# Altium PCB SD171-6.0PCB4.PcbDoc (part 1 of 11)
Units mil, origin at the board's own origin, x right, y up, seen from the top; angles counter-clockwise.
Board outline 5995 x 3921.26 mil, 6 copper layers (Top Layer, GND, Mid-Layer 1, Mid-Layer 2, VCC, Bottom Layer); 477 components, 539 nets, 2143 pads, 1050 vias.
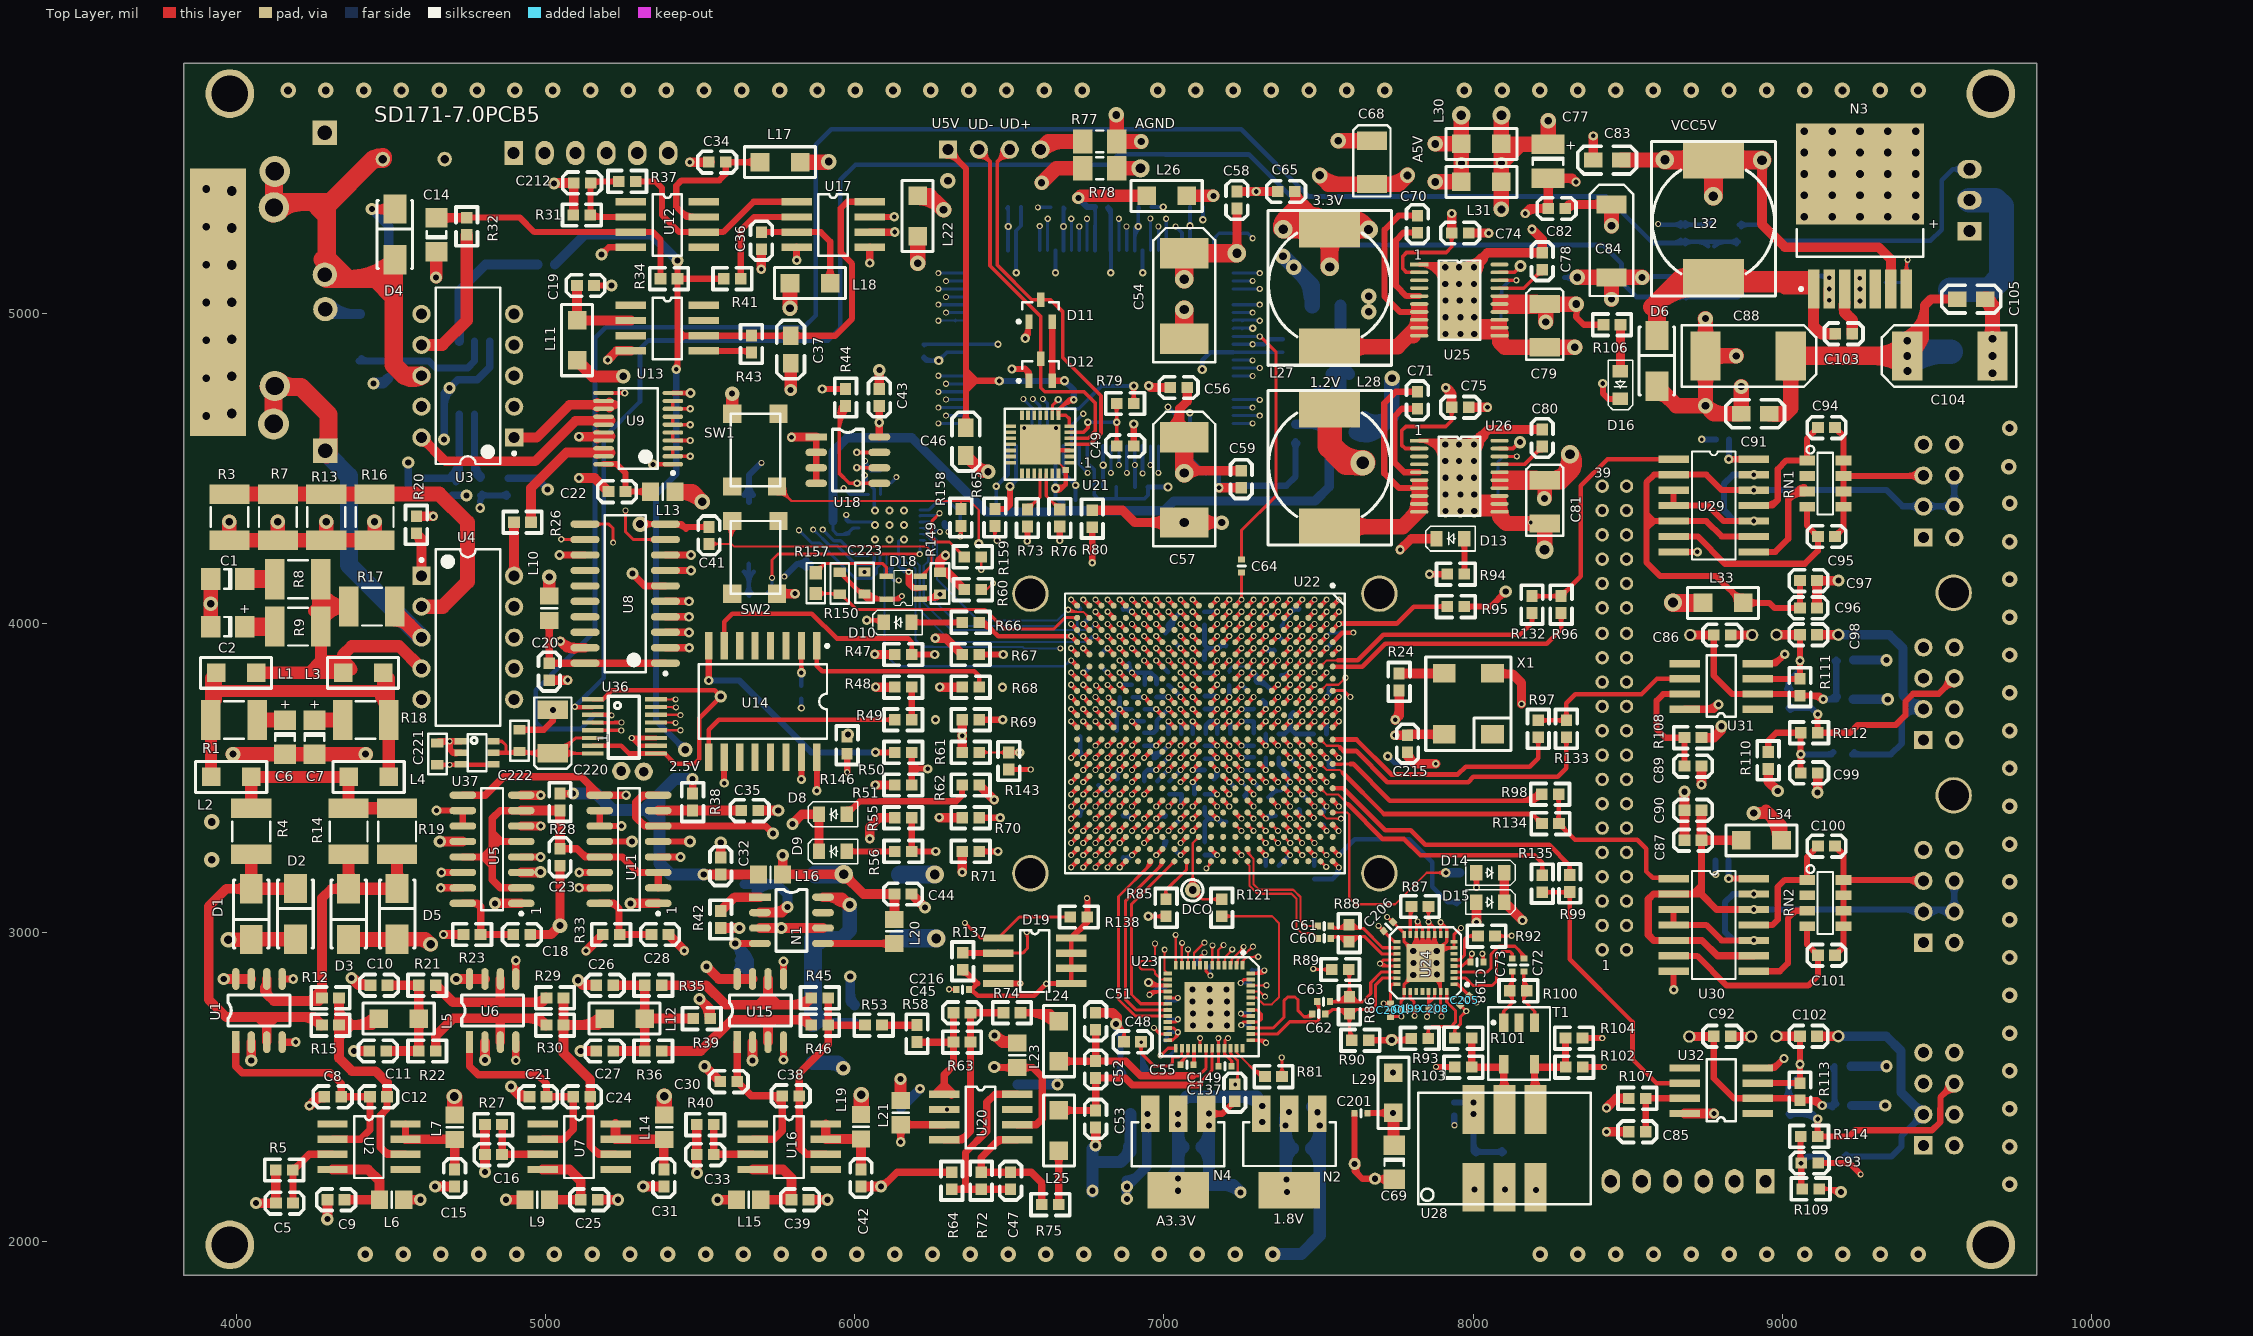
[diagram p0: Top Layer view]
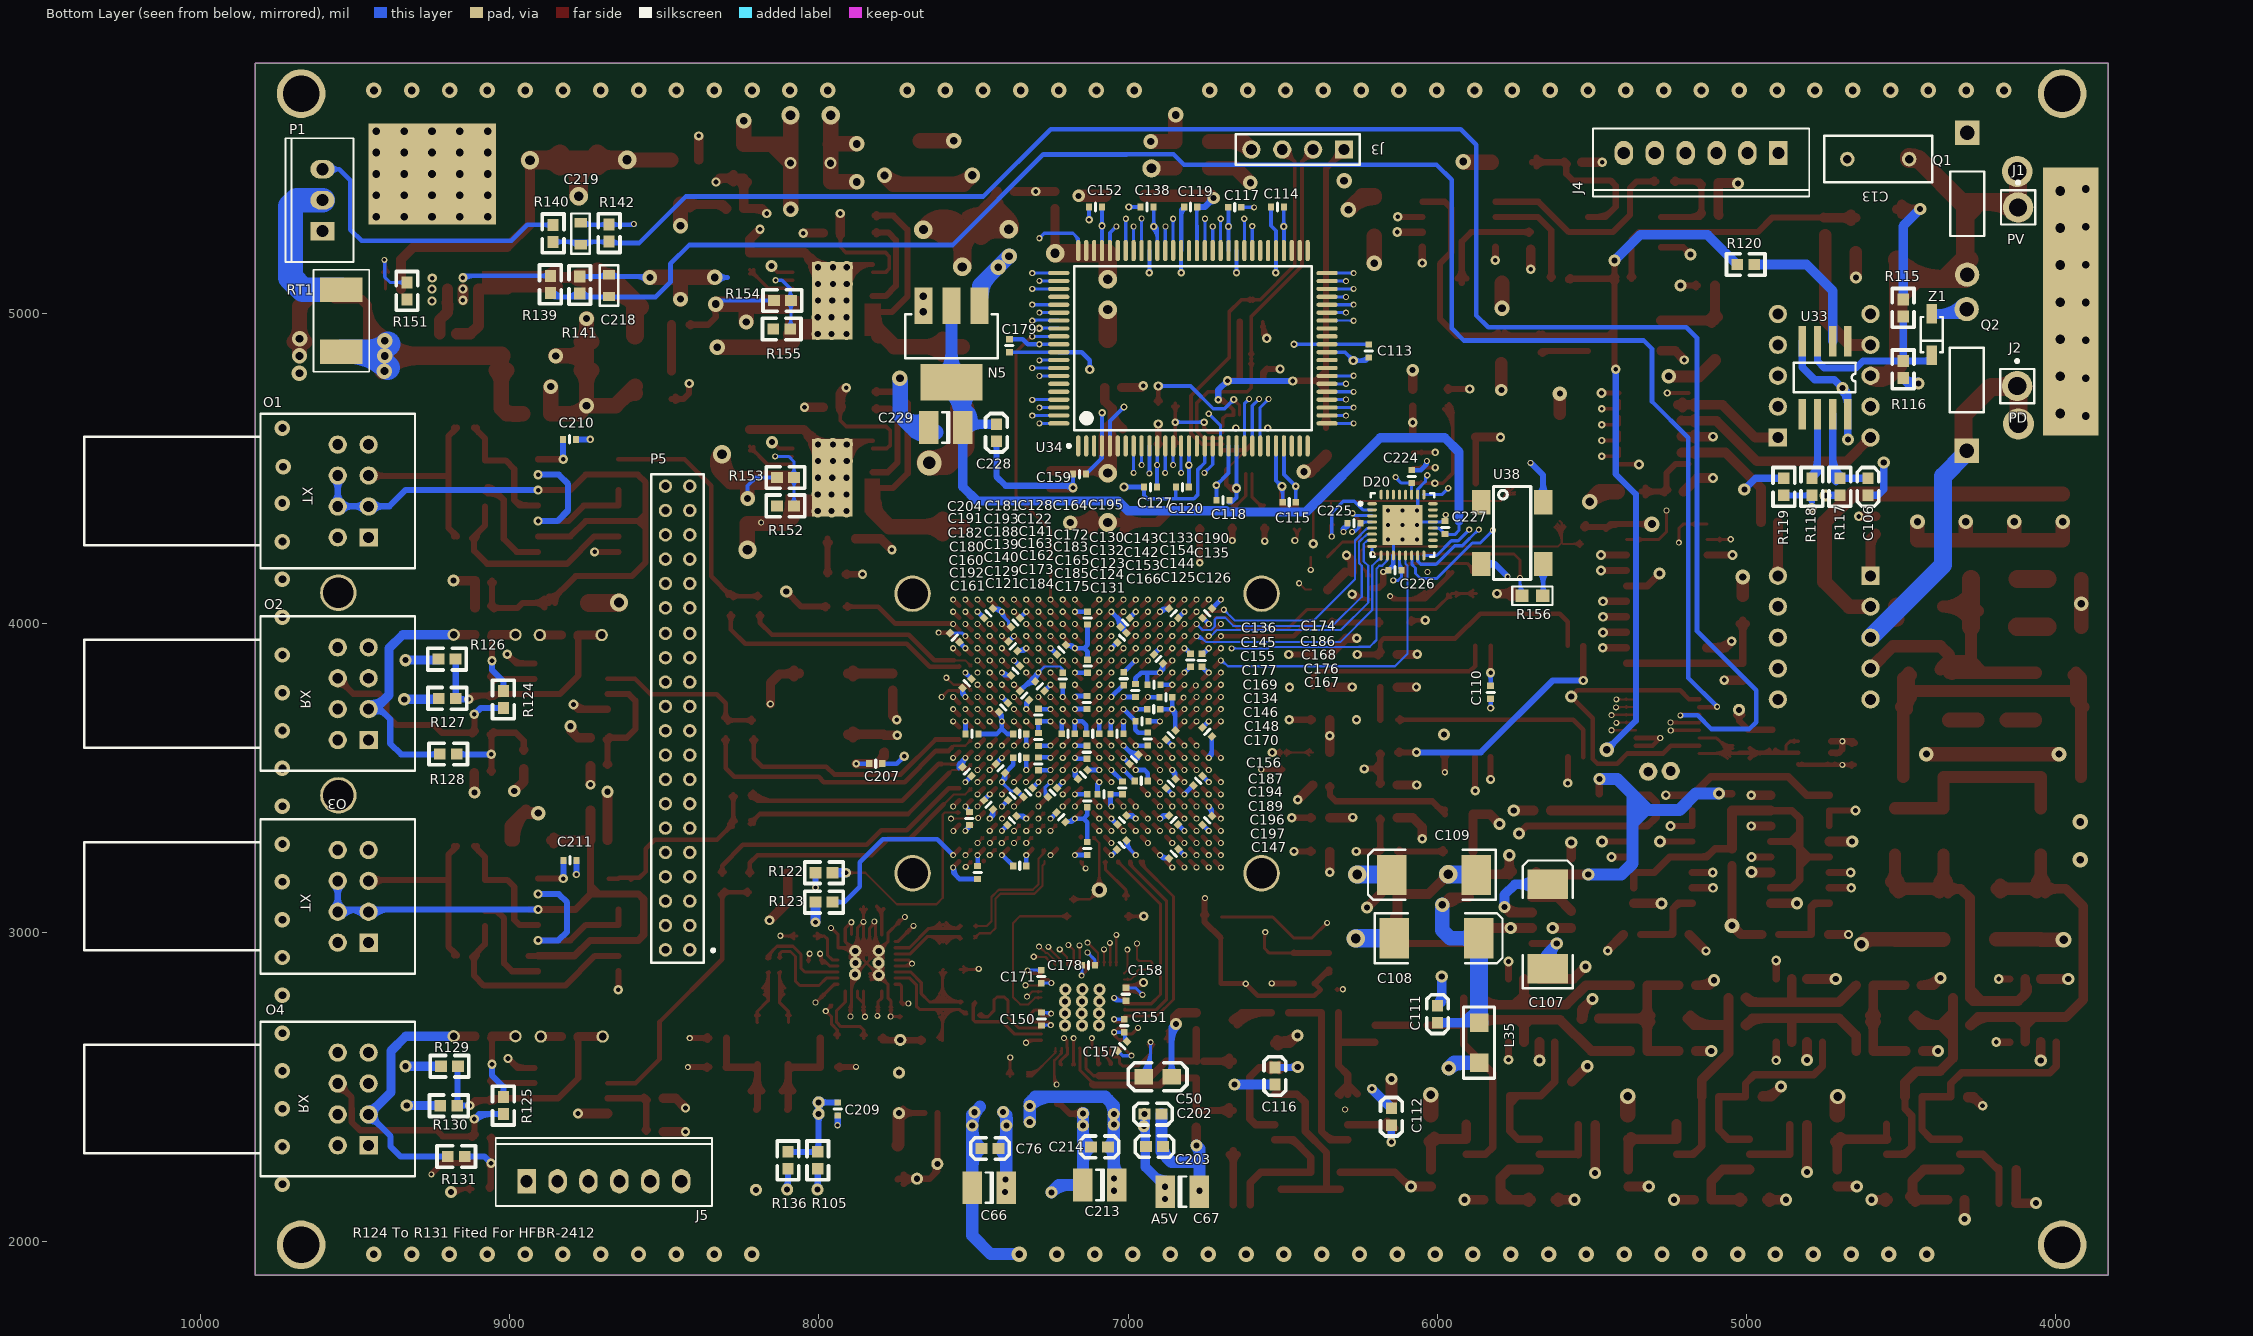
[diagram p1: Bottom Layer view, seen from below]
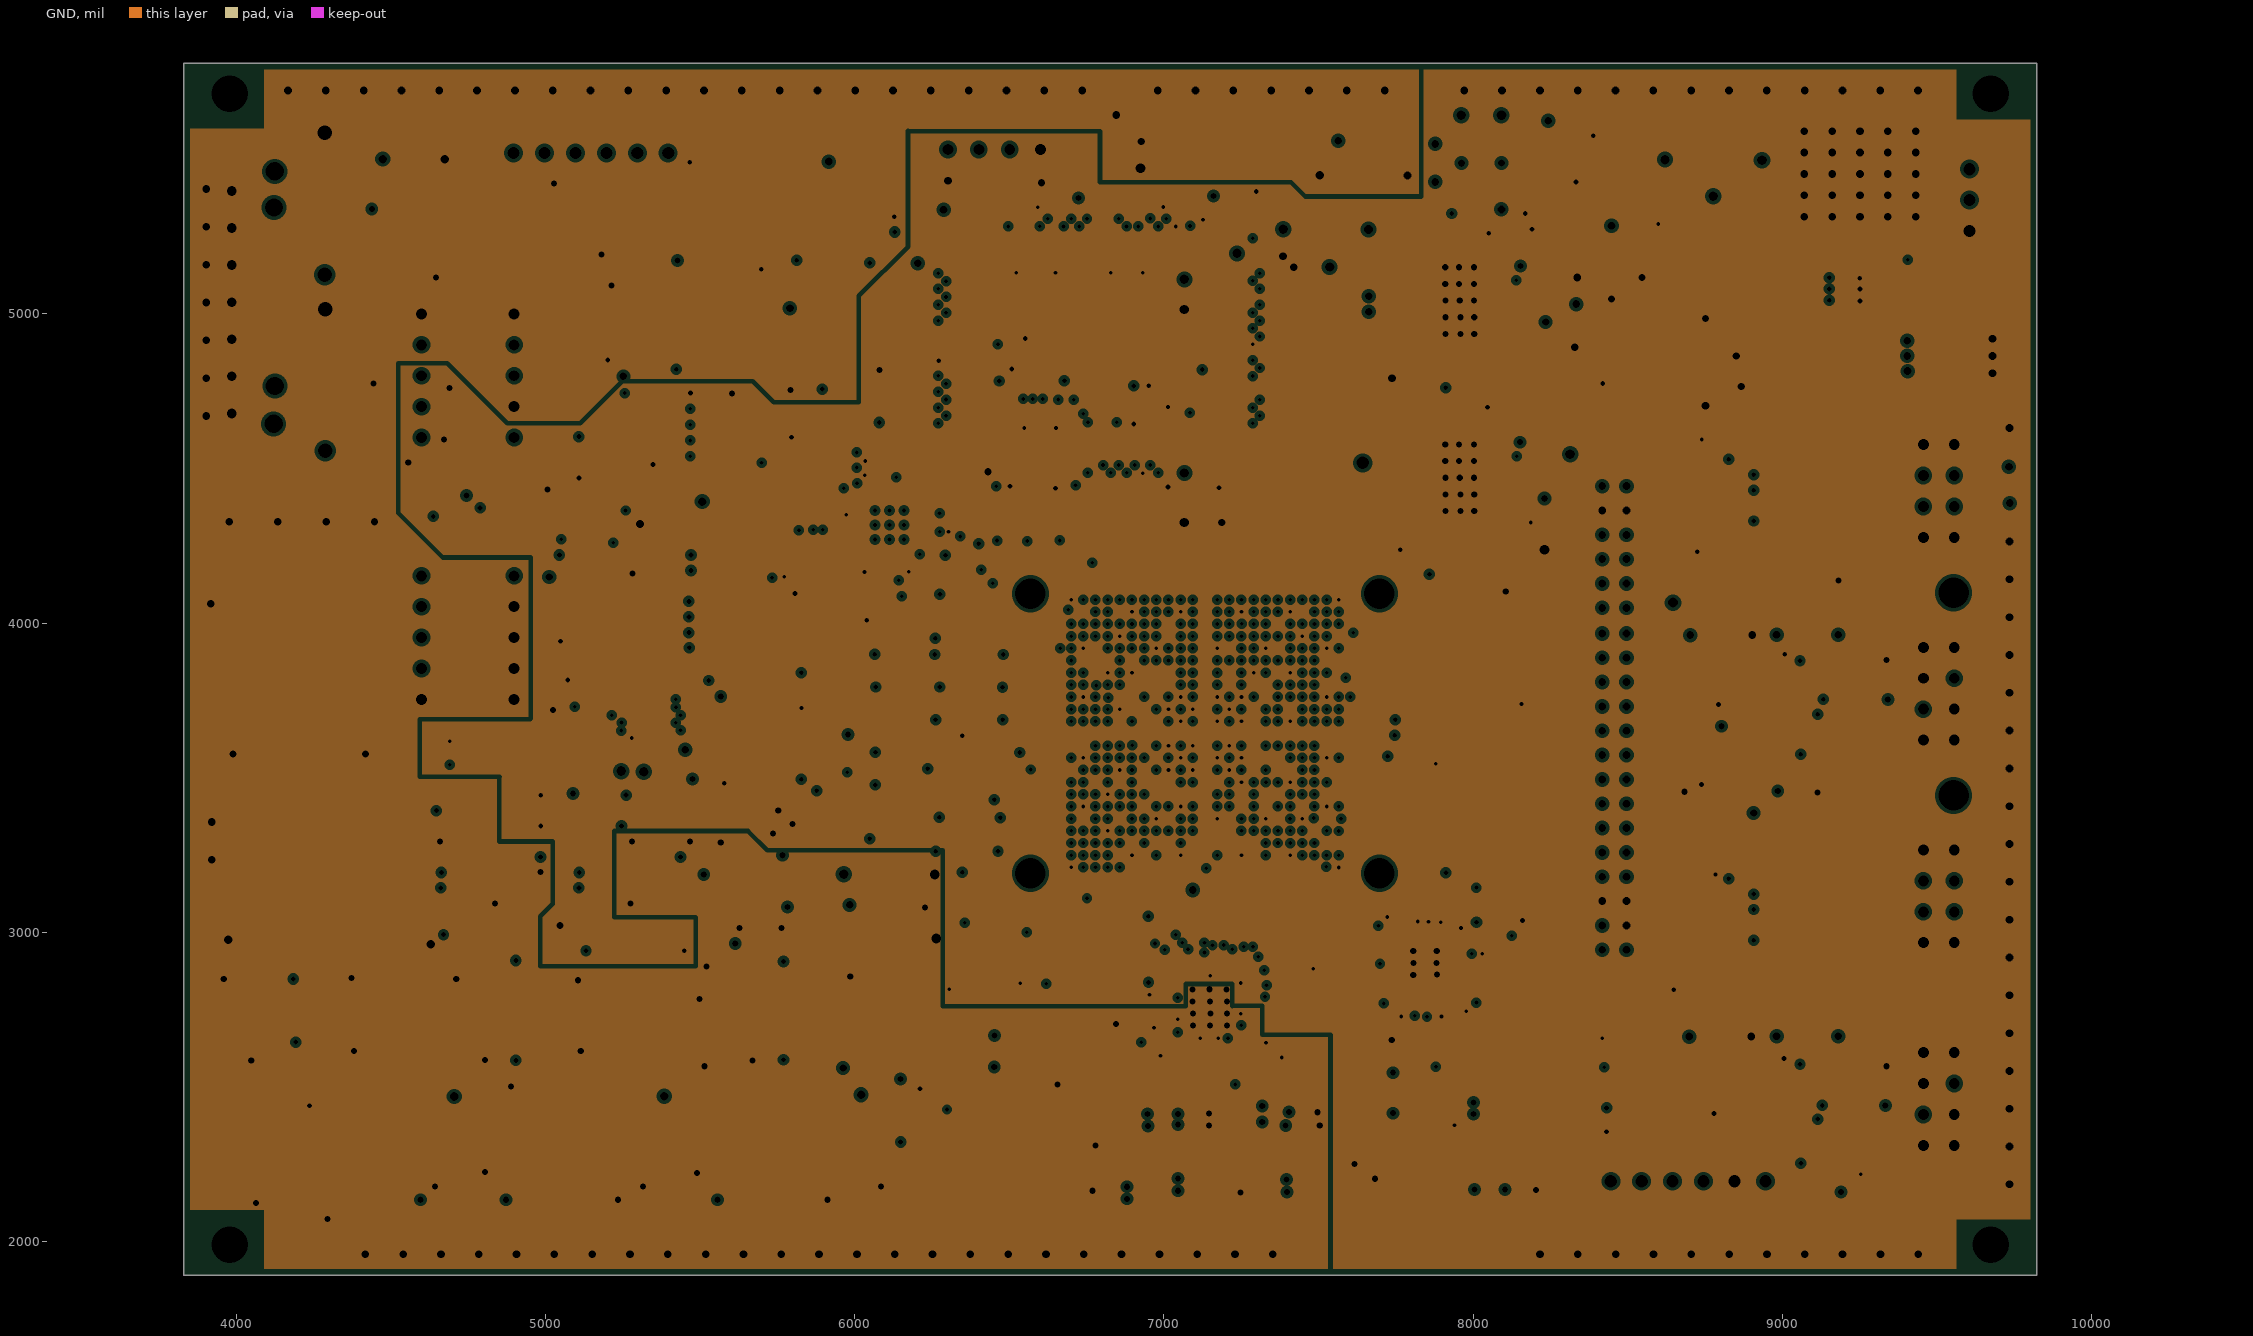
[diagram p2: GND, clearances drawn from the general rule]
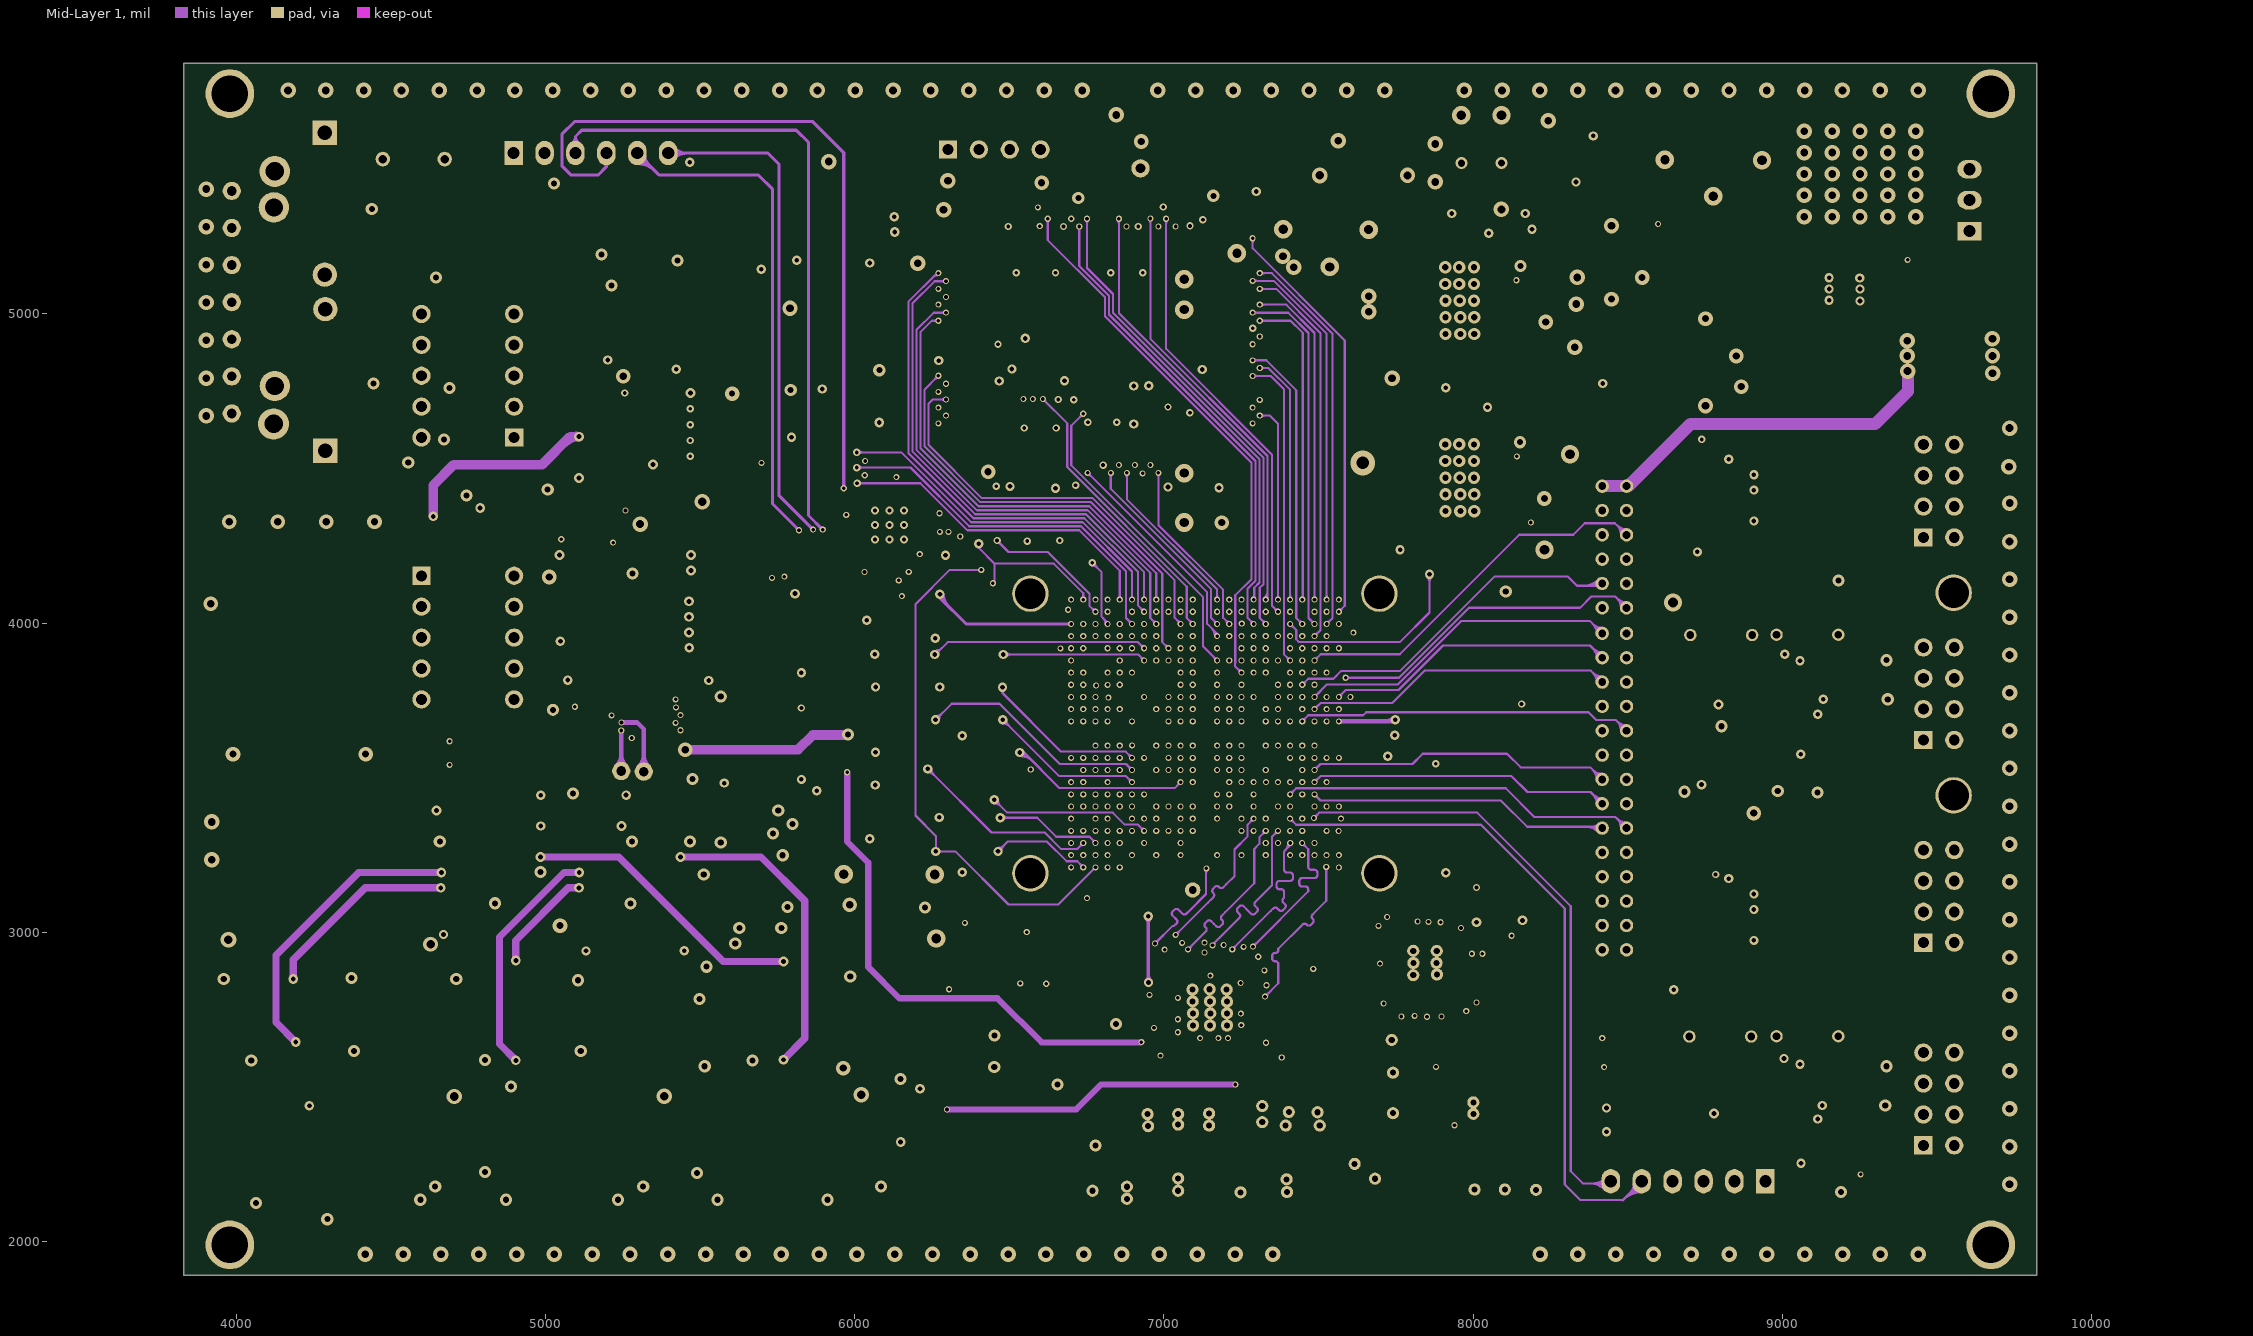
[diagram p3: Mid-Layer 1]
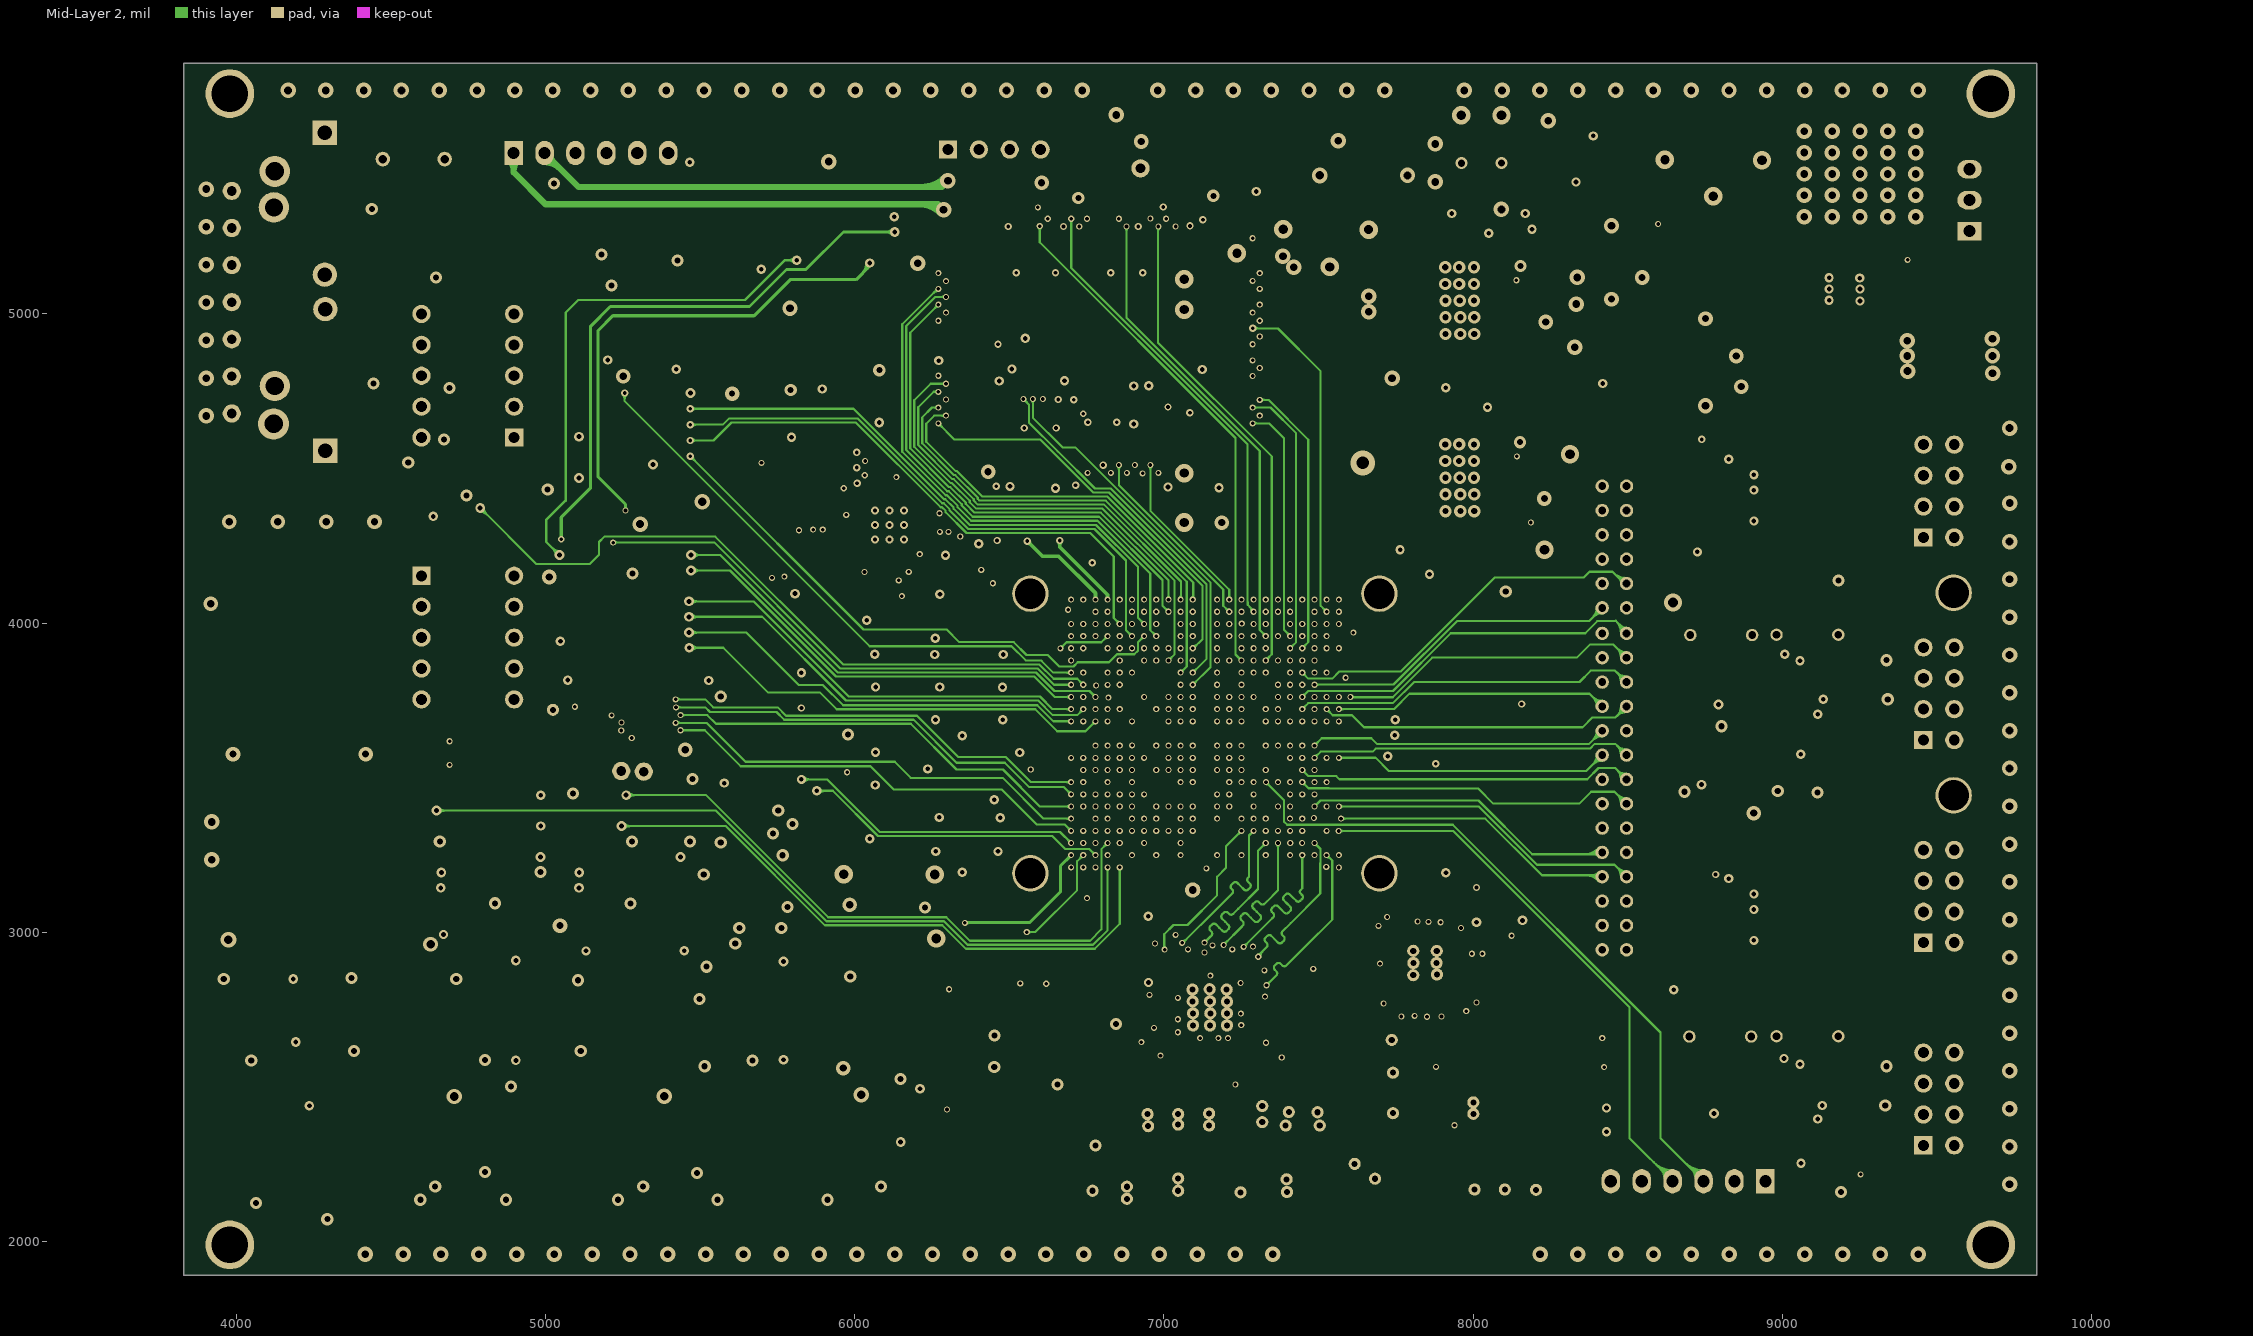
[diagram p4: Mid-Layer 2]
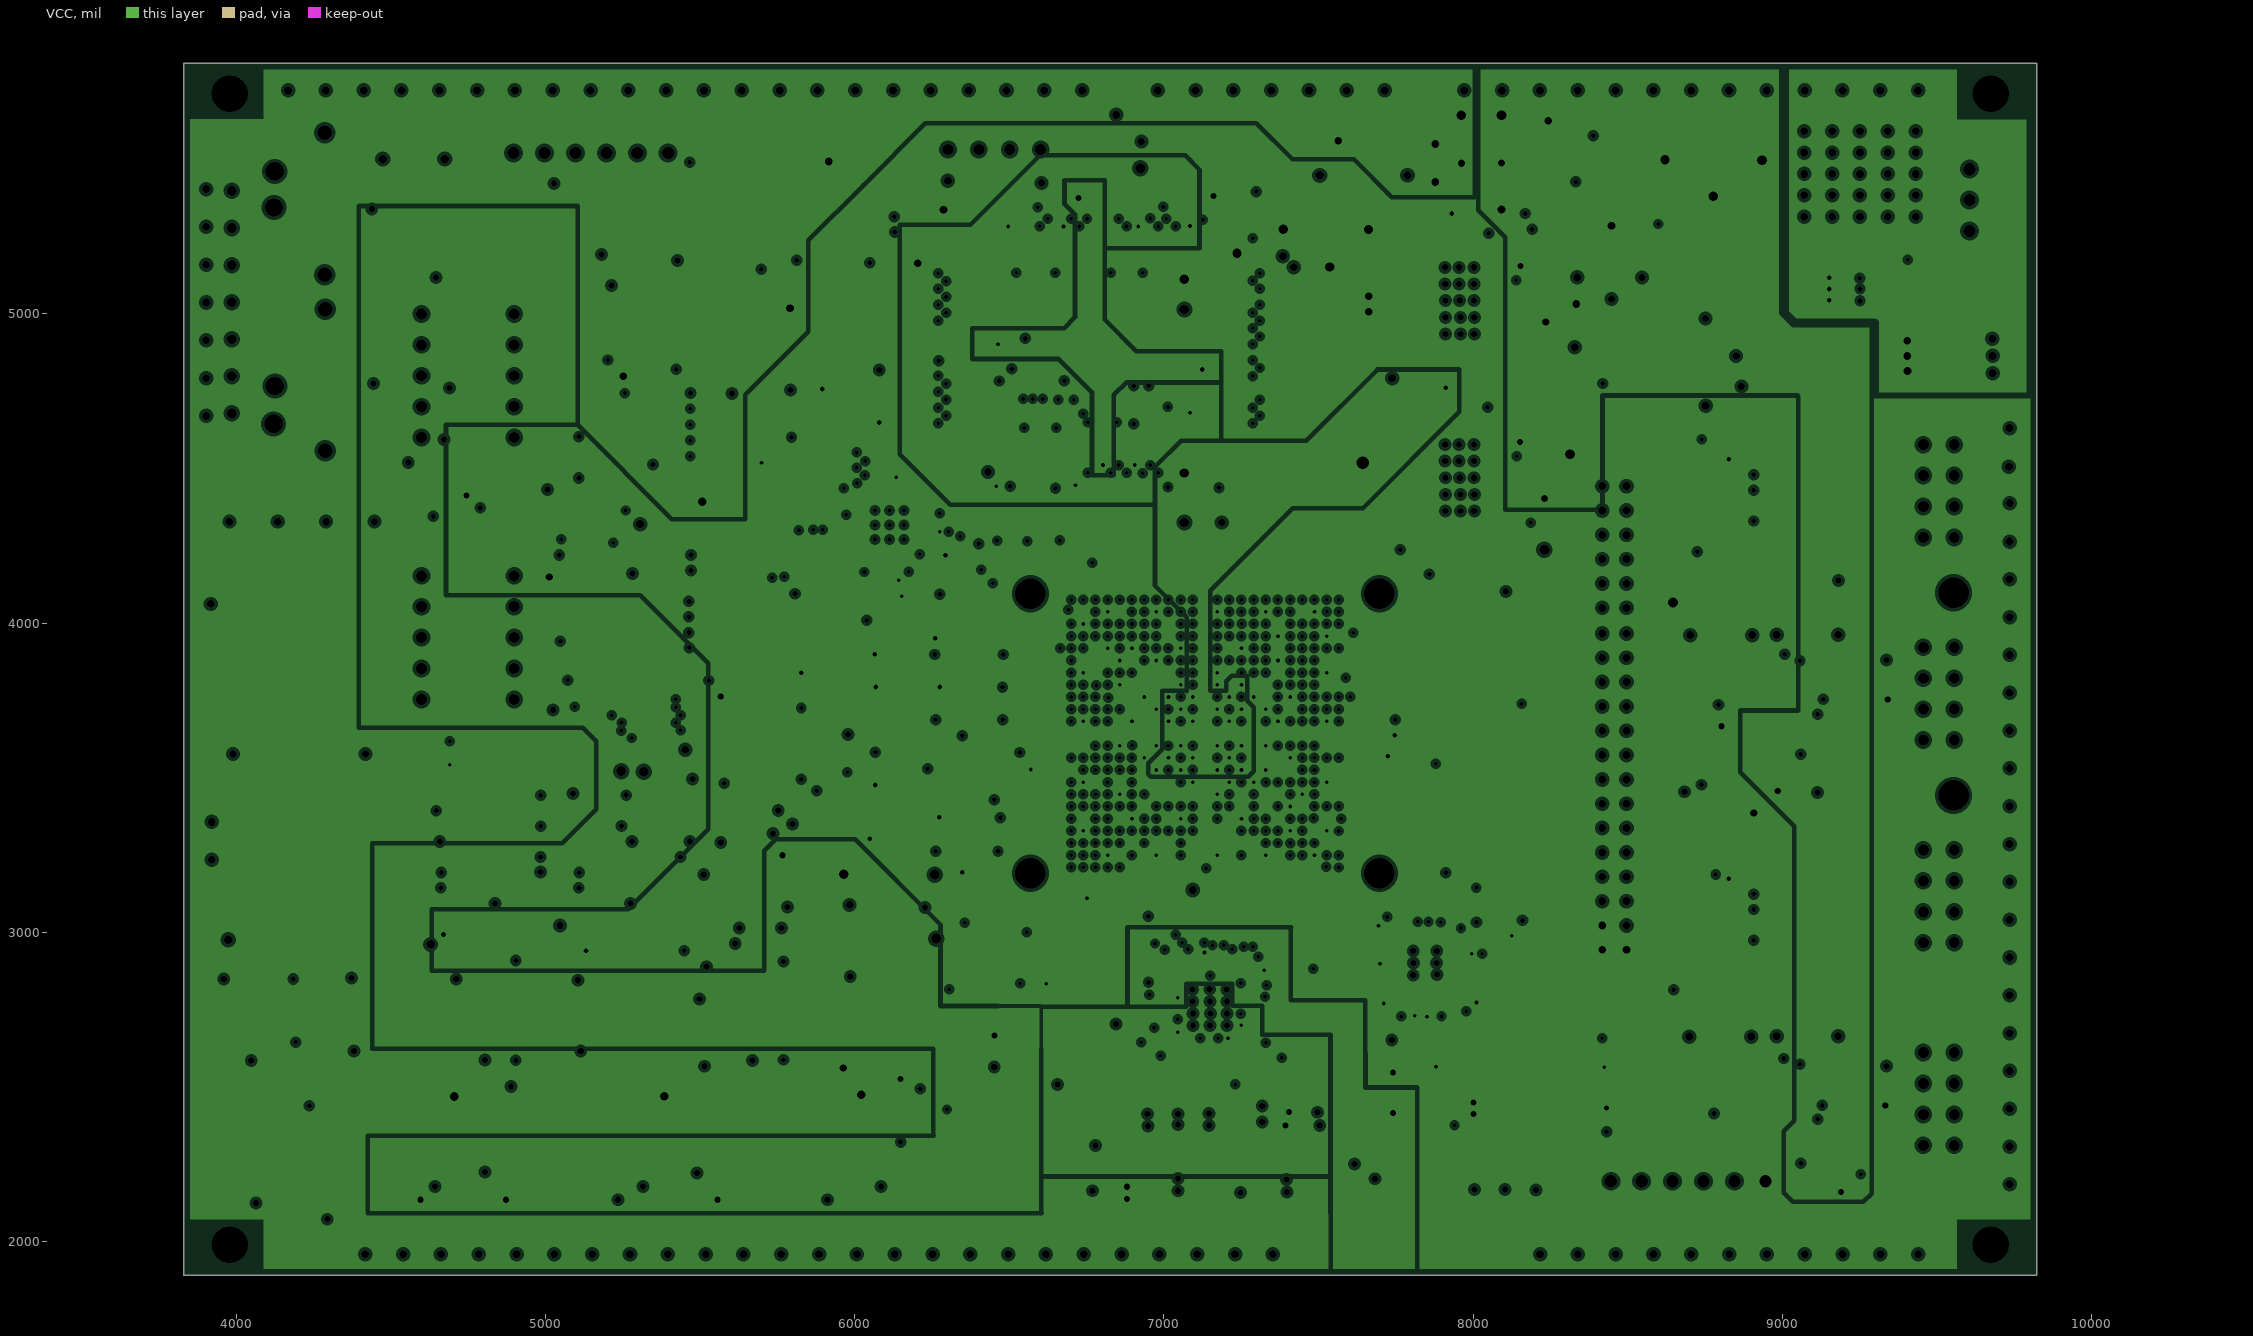
[diagram p5: VCC, clearances drawn from the general rule]

## Layer stack, top to bottom
Top Layer: signal copper 1.4
Dielectric: core 12.6, FR-4, Dk 4.8
GND: plane copper 1.4, net (Multiple Nets)
Dielectric: prepreg 12.6, FR-4, Dk 4.8
Mid-Layer 1: signal copper 1.4
Dielectric: core 12.6, FR-4, Dk 4.8
Mid-Layer 2: signal copper 1.4
Dielectric: prepreg 12.6, FR-4, Dk 4.8
VCC: plane copper 1.4, net (Multiple Nets)
Dielectric: core 12.6, FR-4, Dk 4.8
Bottom Layer: signal copper 1.4

## Board outline
3829,1889.76 9824,1889.76 9824,5811.02 3829,5811.02

## Design rules (kind name [scope] priority, off if disabled: settings)
Clearance [All] p1: gap=6
ComponentClearance [All] p1 off: gap=10 collisioncheckmode=3 verticalgap=10 showdistances=FALSE
DiffPairsRouting [All] p1: maxlimit=10 minlimit=6 mostfreqgap=6 maxuncoupledlength=500
FabricationTestpoint [All] p1: side=3 testpointundercomponent=TRUE minsize=40 maxsize=100 preferedsize=60 minholesize=0 maxholesize=40 preferedholesize=32 testpointgrid=1 allowsidetop=TRUE allowsidebottom=TRUE usegrid=FALSE gridtolerance=0.01
FanoutControl Fanout_LCC [IsLCC] p2: bgadir=Out bgaviamode=Centered fanoutstyle=Auto fanoutdirection=OutOnly viagrid=1 // Fanout_LCC (Default Rule)
FanoutControl Fanout_SOIC [IsSOIC] p3: bgadir=Out bgaviamode=Centered fanoutstyle=Staggered fanoutdirection=Alternating viagrid=1 // Fanout_SOIC (Default Rule)
Height [All] p1 off: minheight=0 maxheight=1000 prefheight=500
HoleSize [All] p1: absolutevalues=TRUE maxlimit=196.85 minlimit=1 maxpercent=80.000 minpercent=20.000
MinimumSolderMaskSliver [All] p1 off: minsoldermaskwidth=6
PlaneClearance [All] p1: clearance=11
PlaneConnect [All] p1: planeconnectstyle=Direct reliefexpansion=20 reliefentries=4 reliefconductorwidth=25 reliefairgap=10
PolygonConnect [All] p1: connectstyle=Relief reliefconductorwidth=30 reliefentries=4 polygonreliefangle="90 Angle"
RoutingVias [All] p1: holewidth=11.81 width=19.68 viastyle="Through Hole" minholewidth=11.81 minwidth=19.68 maxholewidth=78.74 maxwidth=196.85
SilkToSilkClearance [All] p1 off: silktosilkclearance=10
SilkscreenOverComponentPads [All] p1 off: minsilkscreentomaskgap=5
SolderMaskExpansion [All] p1: expansion=4
Width [All] p1: maxlimit=100 minlimit=7 preferedwidth=15
16 further rules are at their usual default settings.

## Classes and differential pairs
component class Sheet6: C1 C2 C5 C6 C7 C8 C9 C10 C11 C12 C13 C14 C15 C16 C18 C19 C20 C21 C22 C23 C24 C25 C26 C27 C28 C30 C31 C32 C33 C34 C35 C36 C37 C38 C39 C42 C44 C45 C47 C51 C52 C53 C106 C107 C108 C109 C111 C112 C116 C212 D1 D2 D3 D4 D5 J1 J2 L1 L2 L3 L4 L5 L6 L7 L9 L10 L11 L12 L13 L14 L15 L16 L17 L18 L19 L20 L21 L23 L24 L25 L35 N1 Q1 Q2 R1 R3 R4 R5 R7 R8 R9 R12 R13 R14 R15 R16 R17 R18 R19 R20 R21 R22 R23 R26 R27 R28 R29 R30 R31 R32 R33 R34 R35 R36 R37 R38 R39 R40 R41 R42 R43 R45 R46 R53 R58 R63 R64 R72 R74 R75 R115 R116 R117 R118 R119 R120 U1 U2 U3 U4 U5 U6 U7 U8 U9 U11 U12 U13 U15 U16 U17 U20 U33 Z1
component class Sheet5: C54 C56 C57 C58 C59 C65 C66 C67 C68 C69 C70 C71 C74 C75 C76 C77 C78 C79 C80 C81 C82 C83 C84 C88 C91 C103 C104 C105 C121 C122 C123 C124 C125 C126 C128 C129 C130 C131 C132 C133 C134 C135 C136 C139 C140 C141 C142 C143 C144 C145 C146 C147 C148 C149 C150 C151 C153 C154 C155 C156 C157 C158 C160 C161 C162 C163 C164 C165 C166 C167 C168 C169 C170 C171 C172 C173 C174 C175 C176 C177 C178 C180 C181 C182 C183 C184 C185 C186 C187 C188 C189 C190 C191 C192 C193 C194 C195 C196 C197 C198 C199 C200 C201 C202 C203 C204 C205 C206 C207 C208 C209 C210 C211 C213 C214 C228 C229 D6 D16 L27 L28 L29 L30 L31 L32 N2 N3 N4 N5 P1 R77 R78 R106 R151 R152 R153 R154 R155 RT1 U25 U26
component class Sheet4: C43 C46 C49 C64 C113 C114 C115 C117 C118 C119 C120 C127 C138 C152 C159 C179 D11 D12 D13 J3 L22 L26 R44 R65 R73 R76 R79 R80 R94 U18 U21 U34
component class Sheet3: C41 C110 C216 C223 C224 C225 C226 C227 D9 D10 D18 D19 D20 J4 J5 R47 R48 R49 R50 R51 R55 R56 R60 R61 R66 R67 R68 R69 R70 R71 R137 R138 R143 R149 R150 R156 R157 R158 R159 SW1 SW2 U14 U38
component class Sheet2: C48 C50 C55 C60 C61 C62 C63 C72 C73 C137 C218 C219 C220 C221 C222 D8 D15 R62 R81 R85 R86 R87 R88 R89 R90 R92 R93 R100 R101 R102 R103 R104 R105 R121 R123 R136 R139 R140 R141 R142 R146 T1 U23 U24 U28 U36 U37
component class Sheet1: C85 C86 C87 C89 C90 C92 C93 C94 C95 C96 C97 C98 C99 C100 C101 C102 C215 D14 L33 L34 O1 O2 O3 O4 P5 R24 R95 R96 R97 R98 R99 R107 R108 R109 R110 R111 R112 R113 R114 R122 R124 R125 R126 R127 R128 R129 R130 R131 R132 R133 R134 R135 RN1 RN2 U22 U29 U30 U31 U32 X1
net class BANK2: ACTLE AD8343_BUSY AD8343_CLK AD8343_CS AD8343_DI AD8343_DO BANK2_NC3 BANK2_NC4 BANK2_NC6 BANK2_NC7 BANK2_NC10 BANK2_NC13 BANK2_NC16 BANK2_NC20 BANK2_NC25 BANK2_NC27 BANK2_NC28 BANK2_NC29 BANK2_NC30 BANK2_NC31 BANK2_NC32 BANK2_NC33 BANK2_NC34 BANK2_NC35 BANK2_NC37 BANK2_NC38 BANK2_NC39 BANK2_NC40 BANK2_NC41 BANK2_NC42 F#LDAC F#SYNC FACLK FADOUT FASCLK FDADIN FDASCLK FPGA_CCLK FPGA_INIT_B FPGA_M0 FPGA_M1 FPGA_MISO0 FPGA_MISO1 FPGA_MISO2 FPGA_MISO3 FPGA_SPI_CS LX75NC1 LX75NC2 LX75NC3 LX75NC4 LX75NC5 LX75NC6 LX75NC7 LX75NC8 LX75NC9 LX75NC10 LX75NC11 LX75NC12 LX75NC13 LX75NC14 LX75NC15 LX75NC16 LX75NC17 LX75NC18 LX75NC19 LX75NC20 LX75NC21 LX75NC22 LX75NC23 LX75NC24 LX75NC25 LX75NC26 LX75NC27 LX75NC28 LX75NC29 LX75NC30 LX75NC31 LX75NC32 LX75NC33 LX75NC34 LX75NC35 LX75NC36 LX75NC37 LX75NC38 LX75NC39 LX75NC40 LX75NC41 LX75NC42 LX75NC43 LX75NC44 LX75NC45 LX75NC46 NetR66_1 NetU2_AA12 NetU2_AA16 NetU2_AB13 NetU2_AB14 NetU2_AB19 NetU2_W4 NetU2_Y4 NetU2_Y12 NetU2_Y13 NetU2_Y15 NetU2_Y17 PVBH SHT_DATA SHT_SCK SYS_RST# WDI
net class BNAK3: A0 A1 A2 A3 A4 A5 A6 A7 A8 A9 A10 A11 A12 A13 A14 A15 A16 A17 A18 ADV B4NC1 B4NC2 B4NC3 B4NC4 B4NC5 B4NC7 B4NC8 B4NC9 B4NC10 B4NC11 B4NC12 B4NC13 B4NC14 B4NC15 B4NC16 B4NC18 B4NC19 B4NC20 B4NC21 B4NC22 B4NC23 B4NC24 B4NC25 B4NC26 B4NC27 B4NC29 BA# BB# CK CKE# DA0 DA1 DA2 DA3 DA4 DA5 DA6 DA7 DA8 DB0 DB1 DB2 DB3 DB4 DB5 DB6 DB7 DB8 E1# E2 E3# EPSCLK EPSDA EPWP FJDQ1A FJDQ1B FJDQ2A FJDQ2B FPGA_ONCHIP_TERM1 FPGA_ONCHIP_TERM2 FT# G# GND LBO# NetD13_1 NetR94_1 URXD UTXD W# ZZ
net class BANK0: BANK0_LED FIO1 FIO2 FIO3 FIO5 FIO6 FIO7 FIO8 FIO9 FIO10 FIO11 FIO12 FIO13 FIO14 FIO15 FIO16 FIO17 FIO18 FIO19 FIO20 FIO21 FIO22 FIO23 FIO24 FIO25 FIO26 FIO30 FIO31 FIO32 FIO33 FIO34 FPGA_HSWAPEN MCLKIN NetR96_2 NetR97_2 NetR98_2 NetR99_2 NetR132_2 NetR133_2 NetR134_2 NetR135_2 NetU2_A6 NetU2_A8 NetU2_A9 NetU2_B14 NetU2_C8 NetU2_C9 NetU2_D7 NetU2_D9 OPRXTAP4
net class AD: D0 D1 D2 D3 D4 D5 D6 D7 D8 D9 D10 D11 D12 D13

## Components (designator, comment, footprint, x,y, rotation, side; value= is the part's Value field where it differs from the comment)
C1 "82pF" 1206C 3970.88,4142 r180 top (schematic designator C82)
C2 "82pF" 1206C 3971,3988 r180 top (schematic designator C83)
C5 "15nF" 0603C 4182,2123 r180 top (schematic designator C212)
C6 "82pF" 1206C 4156,3631 r270 top (schematic designator C182)
C7 "82pF" 1206C 4252,3631 r270 top (schematic designator C181)
C8 "15pF" 0603C 4338,2467 r180 top (schematic designator C198)
C9 "0.1uF" 0603C 4349,2134 r180 top (schematic designator C209)
C10 "12pF" 0603C 4488,2828 r180 top (schematic designator C187)
C11 "12pF" 0603C 4484,2615 r180 top (schematic designator C193)
C12 "1pF" 0603C 4486,2467 r180 top (schematic designator C199)
C13 "1uF" RAD-0.2 4572.72,5501.13 r180 bottom (schematic designator C4)
C14 "0.1uF" 1206C 4645.67,5255.91 r90 top (schematic designator C12)
C15 "0.1uF" 0603C 4705,2232 r270 top (schematic designator C207)
C16 "15nF" 0603C 4858,2280 r180 top (schematic designator C204)
C18 "0.1uF" 0603C 4950,2992 r180 top (schematic designator C84)
C19 "0.1uF" 0603C 5156,5092 r180 top (schematic designator C50)
C20 "0.1uF" 0603C 5011,3870 r270 top (schematic designator C30)
C21 "15pF" 0603C 5002,2467 r180 top (schematic designator C197)
C22 "0.1uF" 0603C 5258,4425 r180 top (schematic designator C21)
C23 "0.1uF" 0603C 5046,3270 r270 top (schematic designator C183)
C24 "1pF" 0603C 5144,2467 r180 top (schematic designator C196)
C25 "0.1uF" 0603C 5113,2134 r0 top (schematic designator C210)
C26 "12pF" 0603C 5218,2828 r180 top (schematic designator C186)
C27 "12pF" 0603C 5218,2615 r180 top (schematic designator C192)
C28 "0.1uF" 0603C 5397,2992 r180 top (schematic designator C180)
C30 "15pF" 0603C 5619,2516 r180 top (schematic designator C195)
C31 "0.1uF" 0603C 5382,2232 r270 top (schematic designator C208)
C32 "0.1uF" 0603C 5566,3186 r90 top (schematic designator C14)
C33 "15nF" 0603C 5543.19,2280 r180 top (schematic designator C202)
C34 "0.1uF" 0603C 5527,5491 r0 top (schematic designator C48)
C35 "0.1uF" 0603C 5632,3393 r0 top (schematic designator C184)
C36 "0.1uF" 0603C 5697.31,5264.69 r270 top (schematic designator C47)
C37 "1.0uF" 0805C 5792,4840 r90 top locked (schematic designator C49)
C38 "1pF" 0603C 5820,2470 r180 top (schematic designator C194)
C39 "0.1uF" 0603C 5795,2134 r0 top (schematic designator C206)
C41 "0.1uF" 0603C 5528,4311 r270 top (schematic designator C13)
C42 "0.1uF" 0603C 6020,2232 r270 top (schematic designator C205)
C43 "0.1uF" 0603C 6079,4702 r90 top (schematic designator C1)
C44 "0.1uF" 0603C 6128,3123 r0 top (schematic designator C13)
C45 "22pF" 0603C 6374,2739 r180 top (schematic designator C185)
C46 "1.0uF" 0805C 6359,4632 r270 top locked
C47 "22pF" 0603C 6504,2168 r90 top (schematic designator C203)
C48 "0.1uF" 0603C 6926,2645 r180 top (schematic designator C28)
C49 "0.1uF" 0603C 6847,4573 r0 top
C50 "1.0uF" 0805C 6949,2532 r180 bottom (schematic designator C29)
C51 "10pF" 0603C 6779,2684 r90 top (schematic designator C190)
C52 "12pF" 0603C 6779,2583 r270 top (schematic designator C188)
C53 "10pF" 0603C 6779,2368 r90 top (schematic designator C189)
C54 "470uF/10V" CAP-D 7066,5058 r90 top locked (schematic designator C119)
C55 "0.1uF" 0402C 7095,2571 r180 top (schematic designator C24)
C56 "0.1uF" 0603C 7075,4762 r180 top (schematic designator C74)
C57 "470uF/10V" CAP-D 7066,4463 r90 top (schematic designator C195)
C58 "0.1uF" 0603C 7236,5341 r90 top (schematic designator C80)
C59 "1000pF" 0603C 7250,4438 r90 top (schematic designator C75)
C60 "0.1uF" 0402C 7497.92,2979.41 r0 top (schematic designator C9)
C61 "0.1uF" 0402C 7497.9,3019.62 r0 top (schematic designator C10)
C62 "0.1uF" 0402C 7480,2735 r0 top (schematic designator C5)
C63 "0.1uF" 0402C 7496,2775 r0 top (schematic designator C7)
C64 "0.1uF" 0402C 7251,4164 r90 top (schematic designator C122)
C65 "1000pF" 0603C 7368,5396 r0 top (schematic designator C82)
C66 "10uF/16V" 1210C 7449,2173 r0 bottom (schematic designator C110)
C67 "1.0uF/25V" 1210C 6824,2160 r180 bottom (schematic designator C109)
C68 "4.7uF" CAP-B 7673,5495 r90 top (schematic designator C102)
C69 "1uF/25V" 1206C 7745,2255 r270 top (schematic designator C104)
C70 "0.047uF" 0603C 7820,5318 r270 top (schematic designator C78)
C71 "0.047uF" 0603C 7820,4748 r270 top (schematic designator C70)
C72 "0.1uF" 0402C 8165,2914 r270 top (schematic designator C8)
C73 "0.1uF" 0402C 8127,2914 r270 top (schematic designator C6)
C74 "0.1uF" 0603C 7931,5262 r0 top (schematic designator C81)
C75 "0.1uF" 0603C 7931,4698 r0 top (schematic designator C73)
C76 "0.1uF" 0603C 7419,2300 r0 bottom (schematic designator C118)
C77 "2.2uF" 1210C 8243,5494 r270 top (schematic designator C101)
C78 "0.1uF" 0603C 8224,5143 r90 top (schematic designator C77)
C79 "10uF/25V" CAP-B 8232,4967 r90 top (schematic designator C45)
C80 "0.1uF" 0603C 8224,4571 r90 top (schematic designator C63)
C81 "10uF/25V" CAP-B 8232,4397 r90 top (schematic designator C71)
C82 "0.01uF" 0603C 8298,5341 r180 top (schematic designator C103)
C83 "0.1uF" 0805C 8479,5498 r180 top (schematic designator C115)
C84 "180uF/16V" CAP-C 8453,5248 r90 top (schematic designator C209)
C85 "0.1uF" 0603C 8559,2354 r180 top locked (schematic designator C41)
C86 "3.3nF" 0603C 8779,3961 r0 top (schematic designator C45)
C87 "0.1uF" 0603C 8739,3297 r180 top (schematic designator C32)
C88 "15uF/50V" CAP-D 8890,4864 r0 top (schematic designator C120)
C89 "0.1uF" 0603C 8684,3537 r0 top (schematic designator C44)
C90 "0.01uF" 0603C 8684,3394 r0 top (schematic designator C33)
C91 "0.1uF" 0805C 8958,4677 r180 top locked (schematic designator C113)
C92 "3.3nF" 0603C 8779,2663 r0 top (schematic designator C40)
C93 "0.1uF" 0603C 9062,2253 r0 top (schematic designator C38)
C94 "100pF" 0603C 9171,4632 r180 top (schematic designator C35)
C95 "100pF" 0603C 9171,4280 r180 top (schematic designator C39)
C96 "0.1uF" 0603C 9058,4049 r0 top (schematic designator C36)
C97 "0.01uF" 0603C 9113,4137 r180 top (schematic designator C37)
C98 "3.3nF" 0603C 9058,3962 r0 top (schematic designator C46)
C99 "0.1uF" 0603C 9060,3515 r0 top (schematic designator C43)
C100 "100pF" 0603C 9171,3278 r180 top (schematic designator C31)
C101 "100pF" 0603C 9171,2925 r180 top (schematic designator C34)
C102 "3.3nF" 0603C 9058,2663 r0 top (schematic designator C42)
C103 "0.01uF" 0603C 9172,4936 r0 top (schematic designator C121)
C104 "15uF/50V" CAP-D 9543,4864 r180 top (schematic designator C111)
C105 "0.47uF" 0805C 9567,5048 r0 top (schematic designator C114)
C106 "0.1uF" 0603C 4606,4468 r270 bottom (schematic designator C213)
C107 "150uF/25V" SMC 5642,3018 r90 bottom (schematic designator C7)
C108 "150uF/25V" SMC 6010,3185 r0 bottom (schematic designator C17)
C109 "150uF/25V" SMC 6002,2980 r180 bottom (schematic designator C2)
C110 "0.1uF" 0402C 5827,3755 r90 bottom (schematic designator C30)
C111 "0.1uF" 0603C 5999,2762 r270 bottom (schematic designator C1)
C112 "0.1uF" 0603C 6148,2430 r270 bottom (schematic designator C200)
C113 "0.1uF" 0402C 6221,4859 r90 bottom (schematic designator C167)
C114 "0.1uF" 0402C 6537,5346 r180 bottom (schematic designator C171)
C115 "0.1uF" 0402C 6499,4391 r180 bottom (schematic designator C172)
C116 "0.1uF" 0603C 6525,2562 r270 bottom (schematic designator C191)
C117 "0.1uF" 0402C 6634,5345 r0 bottom (schematic designator C174)
C118 "0.1uF" 0402C 6672,4397 r0 bottom (schematic designator C177)
C119 "0.1uF" 0402C 6818,5346 r180 bottom (schematic designator C169)
C120 "0.1uF" 0402C 6845,4440 r180 bottom (schematic designator C168)
C121 "0.1uF" 0402C 6729,4046 r315 bottom (schematic designator C86)
C122 "0.1uF" 0402C 6798,3859 r90 bottom (schematic designator C89)
C123 "0.1uF" 0402C 6761,3900 r270 bottom (schematic designator C92)
C124 "0.1uF" 0402C 6729,3633 r45 bottom (schematic designator C131)
C125 "0.1uF" 0402C 6788,3475 r135 bottom (schematic designator C146)
C126 "0.1uF" 0402C 6729,3376 r315 bottom (schematic designator C133)
C127 "0.1uF" 0402C 6948,4440 r180 bottom (schematic designator C176)
C128 "0.1uF" 0402C 6867,4046 r225 bottom (schematic designator C137)
C129 "0.1uF" 0402C 6887,3869 r45 bottom (schematic designator C145)
C130 "0.1uF" 0402C 6857,3760 r0 bottom (schematic designator C136)
C131 "0.1uF" 0402C 6937,3800 r180 bottom (schematic designator C90)
C132 "0.1uF" 0402C 6896,3721 r0 bottom (schematic designator C91)
C133 "0.1uF" 0402C 6847,3652 r315 bottom (schematic designator C134)
C134 "0.1uF" 0402C 6847,3495 r315 bottom (schematic designator C150)
C135 "0.1uF" 0402C 6838,3348 r45 bottom (schematic designator C151)
C136 "0.1uF" 0402C 6867,3239 r135 bottom (schematic designator C132)
C137 "0.1uF" 0603C 7229,2453 r90 top (schematic designator C27)
C138 "0.1uF" 0402C 6959,5346 r180 bottom (schematic designator C173)
C139 "0.1uF" 0402C 7005,3967 r315 bottom (schematic designator C162)
C140 "0.1uF" 0402C 7024,3987 r135 bottom (schematic designator C54)
C141 "0.1uF" 0402C 7014,3799 r90 bottom (schematic designator C85)
C142 "0.1uF" 0402C 6976,3802 r270 bottom (schematic designator C128)
C143 "0.1uF" 0402C 6976,3682 r180 bottom (schematic designator C93)
C144 "0.1uF" 0402C 6936,3645 r270 bottom (schematic designator C135)
C145 "0.1uF" 0402C 6966,3574 r315 bottom (schematic designator C124)
C146 "0.1uF" 0402C 6978,3489 r180 bottom (schematic designator C69)
C147 "0.1uF" 0402C 7005,3377 r315 bottom (schematic designator C154)
C148 "0.1uF" 0402C 7035,3267 r135 bottom (schematic designator C149)
C149 "0.1uF" 0402C 7176.6,2566 r0 top (schematic designator C97)
C150 "0.1uF" 0402C 7280,2739 r270 bottom (schematic designator C98)
C151 "0.1uF" 0402C 7011.98,2717.7 r270 bottom (schematic designator C96)
C152 "0.1uF" 0402C 7126,5346 r180 bottom (schematic designator C175)
C153 "0.1uF" 0402C 7135,3642 r180 bottom (schematic designator C66)
C154 "0.1uF" 0402C 7056,3642 r180 bottom (schematic designator C68)
C155 "0.1uF" 0402C 7057,3446 r0 bottom (schematic designator C61)
C156 "0.1uF" 0402C 7018,3446 r90 bottom (schematic designator C129)
C157 "0.1uF" 0402C 7033.19,2616.05 r135 bottom (schematic designator C95)
C158 "0.1uF" 0402C 7007,2778 r90 bottom (schematic designator C105)
C159 "0.1uF" 0402C 7178,4482 r180 bottom (schematic designator C178)
C160 "0.1uF" 0402C 7131.03,3995 r90 bottom (schematic designator C87)
C161 "0.1uF" 0402C 7201,3928 r315 bottom (schematic designator C141)
C162 "0.1uF" 0402C 7131,3881 r270 bottom (schematic designator C88)
C163 "0.1uF" 0402C 7133.03,3722 r90 bottom (schematic designator C72)
C164 "0.1uF" 0402C 7211,3839 r270 bottom (schematic designator C123)
C165 "0.1uF" 0402C 7173,3641.97 r0 bottom (schematic designator C65)
C166 "0.1uF" 0402C 7133,3561 r90 bottom (schematic designator C67)
C167 "0.1uF" 0402C 7132,3524 r315 bottom (schematic designator C125)
C168 "0.1uF" 0402C 7202,3357 r45 bottom (schematic designator C152)
C169 "0.1uF" 0402C 7132,3404 r90 bottom (schematic designator C62)
C170 "0.1uF" 0402C 7132,3291 r270 bottom (schematic designator C51)
C171 "0.1uF" 0402C 7281,2835 r90 bottom (schematic designator C108)
C172 "0.1uF" 0402C 7300,3810 r225 bottom (schematic designator C130)
C173 "0.1uF" 0402C 7290,3681 r90 bottom (schematic designator C64)
C174 "0.1uF" 0402C 7289.97,3565 r270 bottom (schematic designator C126)
C175 "0.1uF" 0402C 7289.97,3644 r270 bottom (schematic designator C127)
C176 "0.1uF" 0402C 7338,3437 r135 bottom (schematic designator C148)
C177 "0.1uF" 0402C 7259,3437 r135 bottom (schematic designator C143)
C178 "0.1uF" 0402C 7149,2893 r180 bottom (schematic designator C107)
C179 "0.1uF" 0402C 7384,4918 r270 bottom (schematic designator C170)
C180 "0.1uF" 0402C 7379,3987 r135 bottom (schematic designator C138)
C181 "0.1uF" 0402C 7379,3831 r135 bottom (schematic designator C140)
C182 "0.1uF" 0402C 7358,3910 r45 bottom (schematic designator C139)
C183 "0.1uF" 0402C 7350,3780 r225 bottom (schematic designator C163)
C184 "0.1uF" 0402C 7418,3712 r135 bottom (schematic designator C147)
C185 "0.1uF" 0402C 7371,3641 r180 bottom (schematic designator C55)
C186 "0.1uF" 0402C 7371,3564 r180 bottom (schematic designator C60)
C187 "0.1uF" 0402C 7359,3456 r315 bottom (schematic designator C144)
C188 "0.1uF" 0402C 7398,3515 r45 bottom (schematic designator C94)
C189 "0.1uF" 0402C 7361,3376 r315 bottom (schematic designator C142)
C190 "0.1uF" 0402C 7371,3214.03 r180 bottom (schematic designator C52)
C191 "0.1uF" 0402C 7437,4046 r315 bottom (schematic designator C53)
C192 "0.1uF" 0402C 7536,3790 r135 bottom (schematic designator C59)
C193 "0.1uF" 0402C 7484,3640.97 r0 bottom (schematic designator C56)
C194 "0.1uF" 0402C 7536,3534 r225 bottom (schematic designator C58)
C195 "0.1uF" 0402C 7437,3397 r45 bottom (schematic designator C153)
C196 "0.1uF" 0402C 7513,3388 r270 bottom (schematic designator C83)
C197 "0.1uF" 0402C 7487,3172 r90 bottom (schematic designator C57)
C198 "0.1uF" 0402C 8033.4,2903 r180 top (schematic designator C158)
C199 "0.1uF" 0402C 7767.6,2752 r0 top (schematic designator C156)
C200 "0.1uF" 0402C 7733.12,2726.52 r90 top (schematic designator C155)
C201 "0.1uF" 0402C 7616.6,2414 r0 top (schematic designator C106)
C202 "0.01uF" 0603C 6947,2411 r180 bottom (schematic designator C116)
C203 "0.1uF" 0603C 6942,2306 r180 bottom (schematic designator C117)
C204 "0.1uF" 0402C 7546,3938 r45 bottom (schematic designator C84)
C205 "0.1uF" 0402C 7958.43,2764.43 r45 top (schematic designator C160)
C206 "0.1uF" 0402C 7740.65,3032.37 r225 top (schematic designator C166)
C207 "0.1uF" 0402C 7837,3545 r180 bottom (schematic designator C159)
C208 "0.1uF" 0402C 7897.4,2752 r180 top (schematic designator C165)
C209 "0.1uF" 0402C 7939,2407 r90 bottom (schematic designator C157)
C210 "0.1uF" 0402C 8786,4594 r0 bottom (schematic designator C161)
C211 "0.1uF" 0402C 8785,3232 r0 bottom (schematic designator C164)
C212 "0.1uF" 0603C 5145,5424 r180 top
C213 "10uF/16V" 1210C 7091,2182 r0 bottom
C214 "0.1uF" 0603C 7065,2305 r0 bottom
C215 "0.1uF" 0603C 7788,3637 r270 top
C216 "0.1uF" 0402C 6328,2814 r0 top
C218 "104" 0603X 8679,5127 r270 bottom
C219 "104" 0603X 8771,5295 r270 bottom
C220 "10U/25V" CAP-B 5023,3644 r270 top
C221 "104" 0603X 4649,3541 r90 top
C222 "104" 0603X 4915,3584 r90 top
C223 "0.1uF" 0603X 6031,4165 r270 top
C224 "0.1uF" 0402C 6082,4494.4 r270 bottom
C225 "0.1uF" 0402C 6289.4,4323 r180 bottom
C226 "0.1uF" 0402C 6157.4,4171 r180 bottom
C227 "0.1uF" 0402C 5974,4329.4 r270 bottom
C228 "0.1uF" 0603C 7426,4643 r270 bottom
C229 "10uF/16V" 1210C 7590,4633 r0 bottom
D1 "X3ED" L3583A 4047,2977 r90 top (schematic designator D12)
D2 "X3ED" L3583A 4190,3140 r270 top (schematic designator D13)
D3 "X3ED" L3583A 4362,2977 r90 top (schematic designator D14)
D4 "1N4148" L3583A 4511.81,5338.58 r270 top (schematic designator D16)
D5 "X3ED" L3583A 4519,3140 r270 top (schematic designator D15)
D6 "1N5819" L3583A 8595,4929 r270 top (schematic designator D12)
D8 "红色 LED" 0805LED 5974,3381 r180 top locked (schematic designator D11)
D9 "红色 LED" 0805LED 5974,3261 r180 top locked (schematic designator D6)
D10 "红色 LED" 0805LED 6183,4002 r180 top locked (schematic designator D11)
D11 "BAT54S" SOT23-3L 6601,5010.57 r90 top (schematic designator D9)
D12 "BAT54S" SOT23-3L 6601,4819 r90 top (schematic designator D9)
D13 "红色 LED" 0805LED 7972,4273 r180 top locked (schematic designator D11)
D14 "红色 LED" 0805LED 8011,3192 r0 top (schematic designator D11)
D15 "红色 LED" 0805LED 8011,3097 r0 top (schematic designator D11)
D16 "红色 LED" 0805LED 8477,4815 r270 top (schematic designator D11)
D18 "MAX823S" MAX823 6211,4077 r180 top
D19 "SHT11" SMD8XX 6419,2806 r0 top
D20 "XC2C32A-6QFG32I" QFG32_N 6112,4317 r180 bottom
J1 "Socket" PIN1 4120.36,5344.58 r180 bottom
J2 "Socket" PIN1 4123.36,4766.78 r180 bottom
J3 "USB2.0 MINI座" HDR1X4 6301,5532 r0 bottom (schematic designator J4)
J4 "6PIN-2.54MM" SIP6X 4896.8,5521 r0 bottom
J5 "6PIN-2.54MM" SIP6X 8944.91,2193.27 r180 bottom (schematic designator J3)
L1 "1uH" 1206L 3933,3839 r0 top (schematic designator L19)
L2 "1uH" 1206L 4047,3502 r180 top (schematic designator L20)
L3 "1uH" 1206L 4474,3839 r180 top (schematic designator L18)
L4 "1uH" 1206L 4362,3502 r0 top (schematic designator L21)
L5 "3.9uH" 1206L 4459,2720 r0 top (schematic designator L24)
L6 "磁珠" 6-0805_M 4501,2134 r180 top (schematic designator L32)
L7 "磁珠" 6-0805_M 4705,2369 r270 top (schematic designator L30)
L9 "磁珠" 6-0805_M 4972,2134 r0 top (schematic designator L33)
L10 "10uH" 6-0805_M 5011,4048 r90 top (schematic designator L17)
L11 "10uH" 1206L 5101,4850 r90 top (schematic designator L6)
L12 "2.7uH" 1206L 5190,2720 r0 top (schematic designator L23)
L13 "1uH" 6-0805_M 5378,4425 r0 top (schematic designator L16)
L14 "磁珠" 6-0805_M 5383,2369 r270 top (schematic designator L31)
L15 "磁珠" 6-0805_M 5656,2134 r0 top (schematic designator L29)
L16 "1uH" 6-0805_M 5727,3186 r180 top (schematic designator L2)
L17 "10uH" 1206L 5823,5491 r180 top (schematic designator L4)
L18 "10uH" 1206L 5920,5100 r180 top locked (schematic designator L5)
L19 "磁珠" 6-0805_M 6020,2370 r270 top (schematic designator L28)
L20 "BLM21P221SN" 6-0805_M 6127,3002 r90 top (schematic designator L15)
L21 "磁珠" 6-0805_M 6148,2416 r270 top (schematic designator L27)
L22 "10uH" 1206L 6203,5252 r90 top locked (schematic designator L14)
L23 "磁珠" 6-0805_M 6525,2601 r90 top (schematic designator L25)
L24 "1uH" 1206L 6660,2712 r270 top (schematic designator L22)
L25 "1uH" 1206L 6660,2293 r90 top (schematic designator L26)
L26 "10uH" 1206L 6944,5382 r0 top locked (schematic designator L13)
L27 "10uH" L5R2 7336,5334 r270 top (schematic designator L8)
L28 "4.7uH" L5R2 7336,4752 r270 top locked (schematic designator L7)
L29 "10uH" 1206L 7742.17,2414.99 r90 top (schematic designator L10)
L30 "10uH" 1206L 7962,5550 r0 top locked (schematic designator L3)
L31 "10uH" 1206L 7962,5427 r0 top (schematic designator L12)
L32 "33uH" L5R2 8978,5058 r90 top locked (schematic designator L11)
L33 "1uH 磁珠" 1206L 8744,4065 r0 top (schematic designator L3)
L34 "1uH 磁珠" 1206L 8998,3297 r180 top (schematic designator L2)
L35 "10uH" 1206L 5864,2577 r90 bottom
N1 "LM2662M" so_8 5692.75,3113 r0 top (schematic designator N3)
N2 "LM1117MPX-1.8(NSC)" SOT-223 7405.66,2243.17 r180 top
N3 "LM2676S-5.0" TS7B_N 9252,5317 r90 top (schematic designator N2)
N4 "LM1117MPX-3.3(NSC)" SOT-223 7046,2243 r180 top
N5 "LM1117MPX-1.8(NSC)" SOT-223 7571,4857 r0 bottom
O1 "HFBR-1414 TZ" OPT 9507,4427 r270 bottom locked (schematic designator O4)
O2 "HFBR-2416MZ" OPT 9507,3771.33 r270 bottom locked
O3 "HFBR-1414TZ" OPT 9507,3115.67 r270 bottom locked
O4 "HFBR-2416MZ" OPT 9507,2460 r270 bottom locked (schematic designator O1)
P1 "SIP2" SIP3X 9605.49,5268.33 r90 bottom (schematic designator P7)
P5 "20针 双排" HEAD2V40 8457.37,3690.75 r90 bottom locked (schematic designator P1)
Q1 "放电管 EPCOS" PIN-W2/E2.8 4285,5356.48 r270 bottom
Q2 "放电管 EPCOS" PIN-W2/E2.8 4286.66,4786.41 r90 bottom
R1 "101" 1812 3991.2,3686 r180 top (schematic designator R43)
R3 "270R" 1812 3976.38,4342.52 r90 top (schematic designator R20)
R4 "1.5K" 1812 4047,3326 r90 top (schematic designator R97)
R5 "330R" 0603R 4181,2230 r180 top
R7 "220R" 1812 4132.98,4342.52 r90 top (schematic designator R23)
R8 "101" 1812 4197.6,4141.73 r180 top (schematic designator R37)
R9 "101" 1812 4197.6,3988.19 r180 top (schematic designator R38)
R12 "1.5K" 0603R 4331,2787 r180 top (schematic designator R111)
R13 "180R" 1812 4289.59,4342.52 r90 top (schematic designator R27)
R14 "100R" 1812 4362,3326 r90 top (schematic designator R99)
R15 "1.5K" 0603R 4331,2699 r180 top (schematic designator R115)
R16 "180R" 1812 4446.19,4342.52 r90 top (schematic designator R28)
R17 "1.5K" 1812 4437,4053 r180 top (schematic designator R29)
R18 "101" 1812 4417.2,3686 r180 top (schematic designator R42)
R19 "100R" 1812 4519,3326 r90 top (schematic designator R98)
R20 "0R" 0603R 4581,4345 r270 top (schematic designator R9)
R21 "391" 0603R 4644,2828 r180 top (schematic designator R102)
R22 "665R" 0603R 4644,2615 r180 top (schematic designator R116)
R23 "1K" 0603R 4734,2992 r0 top (schematic designator R39)
R24 "" 0603R 7761,3837 r270 top
R26 "0R" 0603R 4897,4326 r0 top (schematic designator R12)
R27 "330R" 0603R 4803,2377 r0 top (schematic designator R120)
R28 "1K" 0603R 5046,3448 r270 top (schematic designator R94)
R29 "2.15K" 0603R 5057,2787 r180 top (schematic designator R108)
R30 "665R" 0603R 5057,2699 r180 top (schematic designator R113)
R31 "10K" 0603R 5089,5320 r0 top (schematic designator R74)
R32 "1M" 0603R 4744.09,5255.91 r90 top
R33 "1K" 0603R 5184,2992 r0 top (schematic designator R41)
R34 "33K" 0603R 5426,5114 r180 top (schematic designator R77)
R35 "471" 0603R 5375,2828 r180 top (schematic designator R100)
R36 "665R" 0603R 5375,2615 r180 top (schematic designator R114)
R37 "1K" 0603R 5236,5429 r0 top (schematic designator R73)
R38 "1K" 0603R 5475,3448 r270 top (schematic designator R96)
R39 "2K" 0603R 5532,2720 r180 top (schematic designator R109)
R40 "330R" 0603R 5488.37,2377 r0 top (schematic designator R118)
R41 "100R" 0603R 5576,5114 r0 top (schematic designator R76)
R42 "1M" 0603R 5566,3068 r270 top (schematic designator R1)
R43 "470K" 0603R 5665,4930 r270 top (schematic designator R78)
R44 "10K" 0603R 5970,4702 r90 top (schematic designator R3)
R45 "1.1K" 0603R 5914,2787 r180 top (schematic designator R104)
R46 "665R" 0603R 5914,2699 r180 top (schematic designator R112)
R47 "1K" 0603R 6184,3898 r180 top (schematic designator R59)
R48 "1.8K" 0603R 6184,3792.5 r180 top (schematic designator R61)
R49 "100R" 0603R 6129,3687 r0 top (schematic designator R48)
R50 "100R" 0603R 6184,3581.5 r180 top (schematic designator R51)
R51 "DNP" 0603R 6184,3476 r180 top (schematic designator R58)
R53 "0R" 0603R 6088,2699 r180 top (schematic designator R103)
R55 "4.7K" 0603R 6184,3370 r180 top (schematic designator R45)
R56 "510R" 0603R 6184,3261 r180 top (schematic designator R47)
R58 "630R" 0603R 6201,2644 r90 top (schematic designator R105)
R60 "4.7K" 0603R 6409,4108 r180 top (schematic designator R44)
R61 "4.7K" 0603R 6347,3581.5 r0 top (schematic designator R50)
R62 "27.4R" 0603R 6347,3476 r0 top (schematic designator R43)
R63 "320R" 0603R 6374,2644 r180 top (schematic designator R106)
R64 "630R" 0603R 6313.33,2168 r90 top (schematic designator R125)
R65 "100R" 0603R 6453,4314 r90 top (schematic designator R71)
R66 "10K" 0603R 6402,4002 r180 top (schematic designator R49)
R67 "4.7K" 0603R 6347,3898 r0 top (schematic designator R70)
R68 "1.8K" 0603R 6402,3792.5 r180 top (schematic designator R60)
R69 "0R" 0603R 6347,3687 r0 top (schematic designator R53)
R70 "4.7K" 0603R 6347,3370 r0 top (schematic designator R52)
R71 "4.7K" 0603R 6347,3261 r0 top (schematic designator R46)
R72 "320R" 0603R 6408.67,2223 r270 top (schematic designator R121)
R73 "0R" 0603R 6558,4312 r90 top (schematic designator R8)
R74 "36R" 0603R 6536,2739 r180 top (schematic designator R107)
R75 "36R" 0603R 6660,2118 r180 top (schematic designator R122)
R76 "0R" 0603R 6663,4312 r90 top (schematic designator R9)
R77 "0R" 1206R 6792,5558 r180 top (schematic designator R83)
R78 "0R" 1206R 6792,5471 r0 top (schematic designator R84)
R79 "4.7K" 0603R 6902,4710 r180 top (schematic designator R7)
R80 "DNP" 0603R 6768,4310 r90 top (schematic designator R72)
R81 "10K" 0603R 7382.1,2532.26 r180 top (schematic designator R42)
R85 "33R" 0603R 7007,3051 r90 top (schematic designator R29)
R86 "100R" 0603R 7600,2791 r270 top (schematic designator R15)
R87 "10R" 0603R 7856,3083 r180 top (schematic designator R92)
R88 "100R" 0603R 7599,3024 r270 top (schematic designator R18)
R89 "240R" 0603R 7598,2879 r180 top (schematic designator R13)
R90 "240R" 0603R 7608,2650 r0 top (schematic designator R14)
R92 "10K" 0603R 8071,2987 r180 top (schematic designator R17)
R93 "4.12K" 0603R 7855,2656 r180 top (schematic designator R11)
R94 "10K" 0603R 7917,4158 r0 top (schematic designator R79)
R95 "100R" 0603R 7972,4053 r180 top
R96 "33R" 0603R 8285,4087 r270 top (schematic designator R55)
R97 "33R" 0603R 8211,3685 r270 top (schematic designator R57)
R98 "33R" 0603R 8277,3446 r180 top (schematic designator R54)
R99 "33R" 0603R 8313,3130 r90 top (schematic designator R56)
R100 "50R" 0603R 8174,2810 r180 top (schematic designator R16)
R101 "82R" 0603R 7941,2657 r0 top (schematic designator R90)
R102 "130R" 0603R 8300,2563 r0 top (schematic designator R88)
R103 "130R" 0603R 7996,2563 r180 top (schematic designator R89)
R104 "82R" 0603R 8354,2657 r180 top (schematic designator R91)
R105 "100R" 0603R 8004,2234.02 r90 bottom (schematic designator R12)
R106 "10K" 0603R 8477,4965 r180 top (schematic designator R80)
R107 "10R" 0603R 8559,2462 r180 top locked (schematic designator R64)
R108 "10R" 0603R 8684,3629 r0 top (schematic designator R68)
R109 "10R" 0603R 9120,2169 r180 top (schematic designator R62)
R110 "10R" 0603R 8955,3528 r90 top (schematic designator R66)
R111 "2.2K" 0603R 9058,3765 r90 top locked (schematic designator R69)
R112 "10R" 0603R 9060,3645 r0 top locked (schematic designator R67)
R113 "2.2K" 0603R 9058,2456 r90 top locked (schematic designator R65)
R114 "10R" 0603R 9060,2339 r0 top locked (schematic designator R63)
R115 "1210" 0603R 4492,5047 r270 bottom (schematic designator R129)
R116 "1210" 0603R 4492,4848 r270 bottom (schematic designator R132)
R117 "10R" 0603R 4696.77,4468 r270 bottom (schematic designator R13)
R118 "0603" 0603R 4787.55,4468 r270 bottom (schematic designator R130)
R119 "100K" 0603R 4878.32,4413 r90 bottom (schematic designator R131)
R120 "0603" 0603R 5029,5160 r180 bottom (schematic designator R128)
R121 "10R" 0603R 7187,3106 r270 top (schematic designator R95)
R122 "10K" 0603R 7956,3192 r0 bottom (schematic designator R6)
R123 "10K" 0603R 7956,3097 r0 bottom (schematic designator R19)
R124 "10R" 0603R 9021,3725 r90 bottom (schematic designator R86)
R125 "0R" 0603R 9021,2411 r90 bottom (schematic designator R82)
R126 "10K" 0603R 9176,3883 r0 bottom (schematic designator R87)
R127 "10K" 0603R 9230,3756 r180 bottom (schematic designator R85)
R128 "10R" 0603R 9172,3576 r0 bottom (schematic designator R84)
R129 "10K" 0603R 9168,2566 r0 bottom (schematic designator R83)
R130 "10K" 0603R 9225,2438 r180 bottom (schematic designator R81)
R131 "10R" 0603R 9146,2274 r0 bottom (schematic designator R80)
R132 "33R" 0603R 8191,4087 r270 top
R133 "33R" 0603R 8302,3685 r270 top
R134 "33R" 0603R 8278,3351 r180 top
R135 "33R" 0603R 8224,3129 r90 top
R136 "100R" 0603R 8100,2234.02 r90 bottom
R137 "103" 0603R 6349,2878 r90 top
R138 "103" 0603R 6752,3049 r180 top
R139 "10K" 0603R 8869,5068 r90 bottom
R140 "10K" 0603R 8860,5233 r90 bottom
R141 "1K" 0603R 8774,5121 r270 bottom
R142 "1K" 0603R 8679,5289 r270 bottom
R143 "4.7K" 0603R 6498,3526 r90 top
R146 "4.7K" 0603R 5975,3632 r270 top
R149 "10K" 0603X 6275,4093 r90 top
R150 "10K" 0603X 5951,4093 r90 top
R151 "1K" 0603R 9333,5102 r270 bottom
R152 "1K" 0603R 8136,4379 r180 bottom
R153 "10K" 0603R 8136,4471 r180 bottom
R154 "10K" 0603R 8145.84,5043.28 r180 bottom
R155 "1K" 0603R 8147.84,4951.28 r180 bottom
R156 "102" 0603 5692,4088 r0 bottom
R157 "0" 0603 5873,4129 r270 top
R158 "33R" 0603R 6343,4314 r90 top
R159 "33R" 0603R 6354,4214 r0 top
RN1 "*" RNS001 9140,4451 r270 top (schematic designator RN2)
RN2 "*" RNS001 9140,3094 r270 top (schematic designator RN1)
RT1 "2A(自恢复保险)" 1812X 9545,5078 r270 bottom
SW1 "RESET开关" RESETKEY 5758,4442 r90 top (schematic designator SW2)
SW2 "RESET开关" RESETKEY 5758,4095 r90 top (schematic designator SW1)
T1 "M/A-Com ETC1_1_13" SM-22 8199,2707 r180 top
U1 "MSW-2-20+" so_8 3997,2644 r90 top (schematic designator U28)
U2 "OPA847ID" SMD8XX 4264.38,2204.09 r0 top (schematic designator U31)
U3 "TQ2SA-L-5V" N10A 4747.64,4800 r180 top (schematic designator U22)
U4 "TQ2SA-L-5V" N10A 4747.64,3952.76 r0 top (schematic designator U22)
U5 "74VHC4053MX" M16A_N 4826,3268 r180 top (schematic designator U24)
U6 "MSW-2-20+" so_8 4753,2644 r90 top (schematic designator U27)
U7 "OPA847ID" SMD8XX 4944.13,2204.09 r0 top (schematic designator U32)
U8 "SN74LVC245PW" NS020_N 5257,4095 r180 top (schematic designator U23)
U9 "74ACT573MTC" MTC20_N 5299,4629 r180 top (schematic designator U21)
U11 "74VHC4053MX" M16A_N 5269,3268 r180 top (schematic designator U25)
U12 "OPA350" SMD8XX 5230,5188 r0 top (schematic designator U18)
U13 "ADR421BR" SMD8XX 5230,4853 r0 top (schematic designator U19)
U14 "M25P64-VMF6" SOIC16 5877,3926 r180 top
U15 "MSW-2-20+" so_8 5619,2644 r90 top (schematic designator U26)
U16 "OPA847ID" SMD8XX 5623.89,2204.09 r0 top (schematic designator U30)
U17 "ADS1251U" SMD8XX 5766,5188 r0 top
U18 "FM24CL04" so_8 5875,4602 r0 top (schematic designator U19)
U20 "AD8138AR" SMD8XX 6243.6,2300.31 r0 top (schematic designator U29)
U21 "CP2102" MLP-28 6594,4599 r180 top locked
U22 "XC6SLX75-L1FGG484I" FGG484 7546,4056 r270 top locked
U23 "AD9246LFCSP" CP-48 7146.81,2758.16 r270 top
U24 "AD9515BCPZ" CP-32-1_5X5 7846,2900 r180 top
U25 "TPS54316" SOP20 7826,5160 r0 top (schematic designator U21)
U26 "TPS54312" SOP20 7826,4590 r0 top (schematic designator U16)
U28 "100M 5x7差分晶振" CCPD-940X-033 8102,2300 r0 top (schematic designator Y3)
U29 "SN74LVC00AD" SMD14X 8649,4530 r0 top (schematic designator U12)
U30 "SN74LVC00AD" SMD14X 8649,3173 r0 top (schematic designator U8)
U31 "MAX997ESA" SMD8XX 8966,3896 r180 top locked (schematic designator U16)
U32 "MAX997ESA" SMD8XX 8966,2588 r180 top locked (schematic designator U14)
U33 "MAX997ESA" SMD8XX 4846.12,4957.62 r270 bottom (schematic designator U34)
U34 "GS880Z18T-100" QFP65P1680X2280-100N 6790,4889 r90 bottom locked (schematic designator U11)
U36 "ADS8343" SOP16X 5152,3753 r0 top
U37 "REF3212" SOT23-6 4778,3580 r270 top
U38 "30MHZ(有源5×7)" 30M 5857,4391 r270 bottom
X1 "100MHz 5x7四脚晶振" XTALSMD 8063,3640 r180 top
Z1 "3V" 425 4400,4933 r90 bottom

## Footprints (in the part's own frame and the unit in brackets; to place one, negate y for a bottom-side part, rotate by r counter-clockwise, add the part's x,y. Pads: shape width x height; smd on the part's side, far side on the other; paste and mask are expansions set on the pad)
6-0805_M [mm] "Chip Resistor, Body 2.0x1.2mm, IPC Low Density"
  rect 1.4x1.5 smd: 1(-1,0) 2(1,0)
  silkscreen extent 0,-0.65 0,0.65, body extent -1.07,-0.7 1.07,0.7, height 0.7
30M [mm]
  rect 2x1.5 smd: 1(0,0) 2(5.08,0) 3(5.08,5.08) 4(0,5.08)
  silkscreen extent -1.27,1.02 6.35,4.06
0402C [mil]
  rect 20x22 smd: 1(-0.3,-0.02) 2(41.7,-0.02)
  silkscreen extent 21,-12 21,12
425 [mm] "SOD-123; 2 Leads; Body 2.7 x 1.6 mm, (LxW)"
  rect 1.6x0.85 smd: 1(1.7,0) 2(-1.7,0)
  silkscreen extent -1.45,-0.9 1.45,0.9
0603 [mil]
  rect 43x40 smd: 1(-33.5,0) 2(33.5,0)
  silkscreen extent -65,-30 65,30
0603C [mil]
  rect 38x36 smd: 1(0,0) 2(55,0)
  silkscreen extent -35,-35 90,35
0603R [mil]
  rect 38x36 smd: 1(0,0) 2(55,0)
  silkscreen extent -35,-35 90,35
0603X [mm]
  rect 0.762x1 smd: 1(0,0) 2(1.8,0)
  silkscreen extent -0.76,-0.76 2.54,0.76
0805C [mil]
  rect 60x50 smd: 1(0,0) 2(90,0)
  silkscreen extent -50,-45 140,45
0805LED [mil]
  rect 40x50 smd: 1(0,0) 2(90,0)
  silkscreen extent -35,-40 125,40
1206C [mm] "Chip Capacitor; Body 3.2 x 1.6 mm (LxW typ)"
  rect 1.6x1.8 smd: 1(-1.4,0) 2(1.4,0)
  silkscreen extent -0.3,-0.8 0.3,0.8
1206L [mil]
  rect 60x60 smd: 1(0,0) 2(130,0)
  silkscreen extent -50,-50 180,50
1206R [mm] "Metal Electrode Face (MELF) Resistor; Body 3.2 x 1.8 mm (LxDia)"
  rect 1.6x2 smd: 1(-1.4,0) 2(1.4,0)
  silkscreen extent -0.3,-0.9 0.3,0.9
1210C [mm] "Chip Capacitor; Body 3.2 x 2.5 mm (LxW typ)"
  rect 1.6x2.7 smd: 1(-1.4,0) 2(1.4,0)
  silkscreen extent -0.3,-1.25 0.3,1.25
1812 [mm] "Chip Capacitor, Body 4.5x3.2mm, IPC High Density"
  rect 1.6x3.3 smd: 1(-1.9,0) 2(1.9,0)
  silkscreen extent -0.8,-1.55 0.8,1.55, body extent -2.4,-1.7 2.4,1.7, height 1.4
1812X [mm]
  rect 2x3.5 smd: 1(0,0) 2(5.08,0)
  silkscreen extent -1.65,-2.29 6.73,2.29
CAP-B [mm]
  rect 1.5x2.5 smd: 1(1.651,0) 2(-1.905,0)
  silkscreen extent -2.92,-1.52 2.92,1.52
CAP-C [mm]
  rect 1.5x2.5 smd: 1(2.698,0.127) 2(-3.302,0.127)
  silkscreen extent -4.83,-1.65 4.32,1.91
CAP-D [mm]
  rect 2.5x4 smd: 1(3.5,0) 2(-3.5,0)
  silkscreen extent -5.46,-2.54 5.59,2.54
CCPD-940X-033 [mm]
  rect 1.8x4 smd: 1(-2.54,-3.2) 2(0,-3.2) 3(2.54,-3.2) 4(2.54,3.2) 5(0,3.2) 6(-2.54,3.2)
  silkscreen extent -7.1,-4.57 7.1,4.57
CP-32-1_5X5 [mm]
  rect 0.58x0.3 smd: 1(-2.333,1.746) 2(-2.333,1.246) 3(-2.333,0.746) 4(-2.333,0.245) 5(-2.333,-0.253) 6(-2.333,-0.753) 7(-2.333,-1.253) 8(-2.333,-1.754) 17(2.326,-1.754) 18(2.326,-1.253) 19(2.326,-0.753) 20(2.326,-0.253) 21(2.326,0.245) 22(2.326,0.746) 23(2.326,1.246) 24(2.326,1.746)
  rect 0.3x0.58 smd: 9(-1.754,-2.333) 10(-1.253,-2.333) 11(-0.753,-2.333) 12(-0.253,-2.333) 13(0.245,-2.333) 14(0.746,-2.333) 15(1.246,-2.333) 16(1.746,-2.333) 25(1.746,2.326) 26(1.246,2.326) 27(0.746,2.326) 28(0.245,2.326) 29(-0.253,2.326) 30(-0.753,2.326) 31(-1.253,2.326) 32(-1.754,2.326)
  rect 3.1x3.1 smd: 33(0,0)
  silkscreen extent -3.56,-2.92 2.92,2.92
CP-48 [mm]
  rect 0.719x0.32 smd: 1(-3.415,2.741) 2(-3.415,2.24) 3(-3.415,1.74) 4(-3.415,1.239) 5(-3.415,0.739) 6(-3.415,0.239) 7(-3.415,-0.259) 8(-3.415,-0.76) 9(-3.415,-1.26) 10(-3.415,-1.76) 11(-3.415,-2.261) 12(-3.415,-2.761) 25(3.408,-2.761) 26(3.408,-2.261) 27(3.408,-1.76) 28(3.408,-1.26) 29(3.408,-0.76) 30(3.408,-0.259) 31(3.408,0.239) 32(3.408,0.739) 33(3.408,1.239) 34(3.408,1.74) 35(3.408,2.24) 36(3.408,2.741)
  rect 0.32x0.719 smd: 13(-2.754,-3.421) 14(-2.254,-3.421) 15(-1.754,-3.421) 16(-1.253,-3.421) 17(-0.753,-3.421) 18(-0.253,-3.421) 19(0.245,-3.421) 20(0.746,-3.421) 21(1.246,-3.421) 22(1.746,-3.421) 23(2.247,-3.421) 24(2.747,-3.421) 37(2.747,3.401) 38(2.247,3.401) 39(1.746,3.401) 40(1.246,3.401) 41(0.746,3.401) 42(0.245,3.401) 43(-0.253,3.401) 44(-0.753,3.401) 45(-1.253,3.401) 46(-1.754,3.401) 47(-2.254,3.401) 48(-2.754,3.401)
  rect 4.1x4.1 smd: 49(0,0)
  silkscreen extent -4.57,-4.06 4.06,4.06
FGG484 [mm]
  round 0.5 smd: A1(0,0) A2(1,0) A3(2,0) A4(3,0) A5(4,0) A6(5,0) A7(6,0) A8(7,0) A9(8,0) A10(9,0) A11(10,0) A12(11,0) A13(12,0) A14(13,0) A15(14,0) A16(15,0) A17(16,0) A18(17,0) A19(18,0) A20(19,0) A21(20,0) A22(21,0) AA1(0,-20) AA2(1,-20) AA3(2,-20) AA4(3,-20) AA5(4,-20) AA6(5,-20) AA7(6,-20) AA8(7,-20) AA9(8,-20) AA10(9,-20) AA11(10,-20) AA12(11,-20) AA13(12,-20) AA14(13,-20) AA15(14,-20) AA16(15,-20) AA17(16,-20) AA18(17,-20) AA19(18,-20) AA20(19,-20) AA21(20,-20) AA22(21,-20) AB1(0,-21) AB2(1,-21) AB3(2,-21) AB4(3,-21) AB5(4,-21) AB6(5,-21) AB7(6,-21) AB8(7,-21) AB9(8,-21) AB10(9,-21) AB11(10,-21) AB12(11,-21) AB13(12,-21) AB14(13,-21) AB15(14,-21) AB16(15,-21) AB17(16,-21) AB18(17,-21) AB19(18,-21) AB20(19,-21) AB21(20,-21) AB22(21,-21) B1(0,-1) B2(1,-1) B3(2,-1) B4(3,-1) B5(4,-1) B6(5,-1) B7(6,-1) B8(7,-1) B9(8,-1) B10(9,-1) B11(10,-1) B12(11,-1) B13(12,-1) B14(13,-1) B15(14,-1) B16(15,-1) B17(16,-1) B18(17,-1) B19(18,-1) B20(19,-1) B21(20,-1) B22(21,-1) C1(0,-2) C2(1,-2) C3(2,-2) C4(3,-2) C5(4,-2) C6(5,-2) C7(6,-2) C8(7,-2) C9(8,-2) C10(9,-2) C11(10,-2) C12(11,-2) C13(12,-2) C14(13,-2) C15(14,-2) C16(15,-2) C17(16,-2) C18(17,-2) C19(18,-2) C20(19,-2) C21(20,-2) C22(21,-2) D1(0,-3) D2(1,-3) D3(2,-3) D4(3,-3) D5(4,-3) D6(5,-3) D7(6,-3) D8(7,-3) D9(8,-3) D10(9,-3) D11(10,-3) D12(11,-3) D13(12,-3) D14(13,-3) D15(14,-3) D16(15,-3) D17(16,-3) D18(17,-3) D19(18,-3) D20(19,-3) D21(20,-3) D22(21,-3) E1(0,-4) E2(1,-4) E3(2,-4) E4(3,-4) E5(4,-4) E6(5,-4) E7(6,-4) E8(7,-4) E9(8,-4) E10(9,-4) E11(10,-4) E12(11,-4) E13(12,-4) E14(13,-4) E15(14,-4) E16(15,-4) E17(16,-4) E18(17,-4) E19(18,-4) E20(19,-4) E21(20,-4) E22(21,-4) F1(0,-5) F2(1,-5) F3(2,-5) F4(3,-5) F5(4,-5) F6(5,-5) F7(6,-5) F8(7,-5) F9(8,-5) F10(9,-5) F11(10,-5) F12(11,-5) F13(12,-5) F14(13,-5) F15(14,-5) F16(15,-5) F17(16,-5) F18(17,-5) F19(18,-5) F20(19,-5) F21(20,-5) F22(21,-5) G1(0,-6) G2(1,-6) G3(2,-6) G4(3,-6) G5(4,-6) G6(5,-6) G7(6,-6) G8(7,-6) G9(8,-6) G10(9,-6) G11(10,-6) G12(11,-6) G13(12,-6) G14(13,-6) G15(14,-6) G16(15,-6) G17(16,-6) G18(17,-6) G19(18,-6) G20(19,-6) G21(20,-6) G22(21,-6) H1(0,-7) H2(1,-7) H3(2,-7) H4(3,-7) H5(4,-7) H6(5,-7) H7(6,-7) H8(7,-7) H9(8,-7) H10(9,-7) H11(10,-7) H12(11,-7) H13(12,-7) H14(13,-7) H15(14,-7) H16(15,-7) H17(16,-7) H18(17,-7) H19(18,-7) H20(19,-7) H21(20,-7) H22(21,-7) J1(0,-8) J2(1,-8) J3(2,-8) J4(3,-8) J5(4,-8) J6(5,-8) J7(6,-8) J8(7,-8) J9(8,-8) J10(9,-8) J11(10,-8) J12(11,-8) J13(12,-8) J14(13,-8) J15(14,-8) J16(15,-8) J17(16,-8) J18(17,-8) J19(18,-8) J20(19,-8) J21(20,-8) J22(21,-8) K1(0,-9) K2(1,-9) K3(2,-9) K4(3,-9) K5(4,-9) K6(5,-9) K7(6,-9) K8(7,-9) K9(8,-9) K10(9,-9) K11(10,-9) K12(11,-9) K13(12,-9) K14(13,-9) K15(14,-9) K16(15,-9) K17(16,-9) K18(17,-9) K19(18,-9) K20(19,-9) K21(20,-9) K22(21,-9) L1(0,-10) L2(1,-10) L3(2,-10) L4(3,-10) L5(4,-10) L6(5,-10) L7(6,-10) L8(7,-10) L9(8,-10) L10(9,-10) L11(10,-10) L12(11,-10) L13(12,-10) L14(13,-10) L15(14,-10) L16(15,-10) L17(16,-10) L18(17,-10) L19(18,-10) L20(19,-10) L21(20,-10) L22(21,-10) M1(0,-11) M2(1,-11) M3(2,-11) M4(3,-11) M5(4,-11) M6(5,-11) M7(6,-11) M8(7,-11) M9(8,-11) M10(9,-11) M11(10,-11) M12(11,-11) M13(12,-11) M14(13,-11) M15(14,-11) M16(15,-11) M17(16,-11) M18(17,-11) M19(18,-11) M20(19,-11) M21(20,-11) M22(21,-11) N1(0,-12) N2(1,-12) N3(2,-12) N4(3,-12) N5(4,-12) N6(5,-12) N7(6,-12) N8(7,-12) N9(8,-12) N10(9,-12) N11(10,-12) N12(11,-12) N13(12,-12) N14(13,-12) N15(14,-12) N16(15,-12) N17(16,-12) N18(17,-12) N19(18,-12) N20(19,-12) N21(20,-12) N22(21,-12) P1(0,-13) P2(1,-13) P3(2,-13) P4(3,-13) P5(4,-13) P6(5,-13) P7(6,-13) P8(7,-13) P9(8,-13) P10(9,-13) P11(10,-13) P12(11,-13) P13(12,-13) P14(13,-13) P15(14,-13) P16(15,-13) P17(16,-13) P18(17,-13) P19(18,-13) P20(19,-13) P21(20,-13) P22(21,-13) R1(0,-14) R2(1,-14) R3(2,-14) R4(3,-14) R5(4,-14) R6(5,-14) R7(6,-14) R8(7,-14) R9(8,-14) R10(9,-14) R11(10,-14) R12(11,-14) R13(12,-14) R14(13,-14) R15(14,-14) R16(15,-14) R17(16,-14) R18(17,-14) R19(18,-14) R20(19,-14) R21(20,-14) R22(21,-14) T1(0,-15) T2(1,-15) T3(2,-15) T4(3,-15) T5(4,-15) T6(5,-15) T7(6,-15) T8(7,-15) T9(8,-15) T10(9,-15) T11(10,-15) T12(11,-15) T13(12,-15) T14(13,-15) T15(14,-15) T16(15,-15) T17(16,-15) T18(17,-15) T19(18,-15) T20(19,-15) T21(20,-15) T22(21,-15) U1(0,-16) U2(1,-16) U3(2,-16) U4(3,-16) U5(4,-16) U6(5,-16) U7(6,-16) U8(7,-16) U9(8,-16) U10(9,-16) U11(10,-16) U12(11,-16) U13(12,-16) U14(13,-16) U15(14,-16) U16(15,-16) U17(16,-16) U18(17,-16) U19(18,-16) U20(19,-16) U21(20,-16) U22(21,-16) V1(0,-17) V2(1,-17) V3(2,-17) V4(3,-17) V5(4,-17) V6(5,-17) V7(6,-17) V8(7,-17) V9(8,-17) V10(9,-17) V11(10,-17) V12(11,-17) V13(12,-17) V14(13,-17) V15(14,-17) V16(15,-17) V17(16,-17) V18(17,-17) V19(18,-17) V20(19,-17) V21(20,-17) V22(21,-17) W1(0,-18) W2(1,-18) W3(2,-18) W4(3,-18) W5(4,-18) W6(5,-18) W7(6,-18) W8(7,-18) W9(8,-18) W10(9,-18) W11(10,-18) W12(11,-18) W13(12,-18) W14(13,-18) W15(14,-18) W16(15,-18) W17(16,-18) W18(17,-18) W19(18,-18) W20(19,-18) W21(20,-18) W22(21,-18) Y1(0,-19) Y2(1,-19) Y3(2,-19) Y4(3,-19) Y5(4,-19) Y6(5,-19) Y7(6,-19) Y8(7,-19) Y9(8,-19) Y10(9,-19) Y11(10,-19) Y12(11,-19) Y13(12,-19) Y14(13,-19) Y15(14,-19) Y16(15,-19) Y17(16,-19) Y18(17,-19) Y19(18,-19) Y20(19,-19) Y21(20,-19) Y22(21,-19)
  silkscreen extent -1.77,-22 22,1
HDR1X4 [mm] "Connector; Header; 4 Position"
  rect 1.5x1.5 hole 0.9: 1(0,0)
  round 1.5 hole 0.9: 2(2.54,0) 3(5.08,0) 4(7.62,0)
  silkscreen extent -1.27,-1.27 8.89,1.27
HEAD2V40 [mm]
  round 1.1 hole 0.65: 1(-19,-1) 2(-19,1) 3(-17,-1) 4(-17,1) 5(-15,-1) 6(-15,1) 7(-13,-1) 8(-13,1) 9(-11,-1) 10(-11,1) 11(-9,-1) 12(-9,1) 13(-7,-1) 14(-7,1) 15(-5,-1) 16(-5,1) 17(-3,-1) 18(-3,1) 19(-1,-1) 20(-1,1) 21(1,-1) 22(1,1) 23(3,-1) 24(3,1) 25(5,-1) 26(5,1) 27(7,-1) 28(7,1) 29(9.1,-1) 30(9.1,1) 31(11.1,-1) 32(11.1,1) 33(13.1,-1) 34(13.1,1) 35(15.1,-1) 36(15.1,1) 37(17.1,-1) 38(17.1,1) 39(19.1,-1) 40(19.1,1)
  silkscreen extent -20.07,-3.05 20.07,2.16, body extent -20.07,-2.17 20.07,2.16, height 4.8
L5R2 [mm]
  rect 3x5 smd: 1(1.524,5.08) 2(11.176,5.08)
  silkscreen extent 0,0 12.7,10.16
L3583A [mil]
  rect 95x74.02 smd: 1(163.02,0) 2(-1,0)
  silkscreen extent -29,-57 191,57
M16A_N [mm] "SOIC, 16-Leads, Body 9.9x3.9mm, Pitch 1.27mm, IPC Medium Density"
  oval 2.2x0.6 smd: 1(-2.4,4.445) 2(-2.4,3.175) 3(-2.4,1.905) 4(-2.4,0.635) 5(-2.4,-0.635) 6(-2.4,-1.905) 7(-2.4,-3.175) 8(-2.4,-4.445) 9(2.4,-4.445) 10(2.4,-3.175) 11(2.4,-1.905) 12(2.4,-0.635) 13(2.4,0.635) 14(2.4,1.905) 15(2.4,3.175) 16(2.4,4.445)
  silkscreen extent -2.53,-5 0.9,5.42, body extent -2,-5 2,5, height 1.75
MAX823 [mm]
  rect 1.1x0.45 smd: 1(-0.023,0.017) 2(-0.023,-0.933) 3(-0.023,-1.883) 4(2.777,-1.883) 5(2.777,0.017)
  silkscreen extent 0.61,-2.4 2.14,0.49
MLP-28 [mm]
  rect 0.5x0.5 smd: 0(-2.24,2.632)
  rect 3.3x3.3 smd: 0(-0.14,0.532)
  rect 0.8x0.3 smd: 1(-2.54,2.032) 2(-2.54,1.532) 3(-2.54,1.032) 4(-2.54,0.532) 5(-2.54,0.032) 6(-2.54,-0.468) 7(-2.54,-0.968) 15(2.26,-0.968) 16(2.26,-0.468) 17(2.26,0.032) 18(2.26,0.532) 19(2.26,1.032) 20(2.26,1.532) 21(2.26,2.032)
  rect 0.3x0.8 smd: 8(-1.64,-1.868) 9(-1.14,-1.868) 10(-0.64,-1.868) 11(-0.14,-1.868) 12(0.36,-1.868) 13(0.86,-1.868) 14(1.36,-1.868) 22(1.36,2.932) 23(0.86,2.932) 24(0.36,2.932) 25(-0.14,2.932) 26(-0.64,2.932) 27(-1.14,2.932) 28(-1.64,2.932)
  silkscreen extent -3.04,-2.39 2.76,3.43